# Altium PCB AX309.REV.1.0.PcbDoc (part 1 of 10)
Units mil, origin at the board's own origin, x right, y up, seen from the top; angles counter-clockwise.
Board outline 5185 x 3614 mil, 4 copper layers (Top Layer, GND, Mid-Layer 1, Bottom Layer); 191 components, 352 nets, 1106 pads, 425 vias.
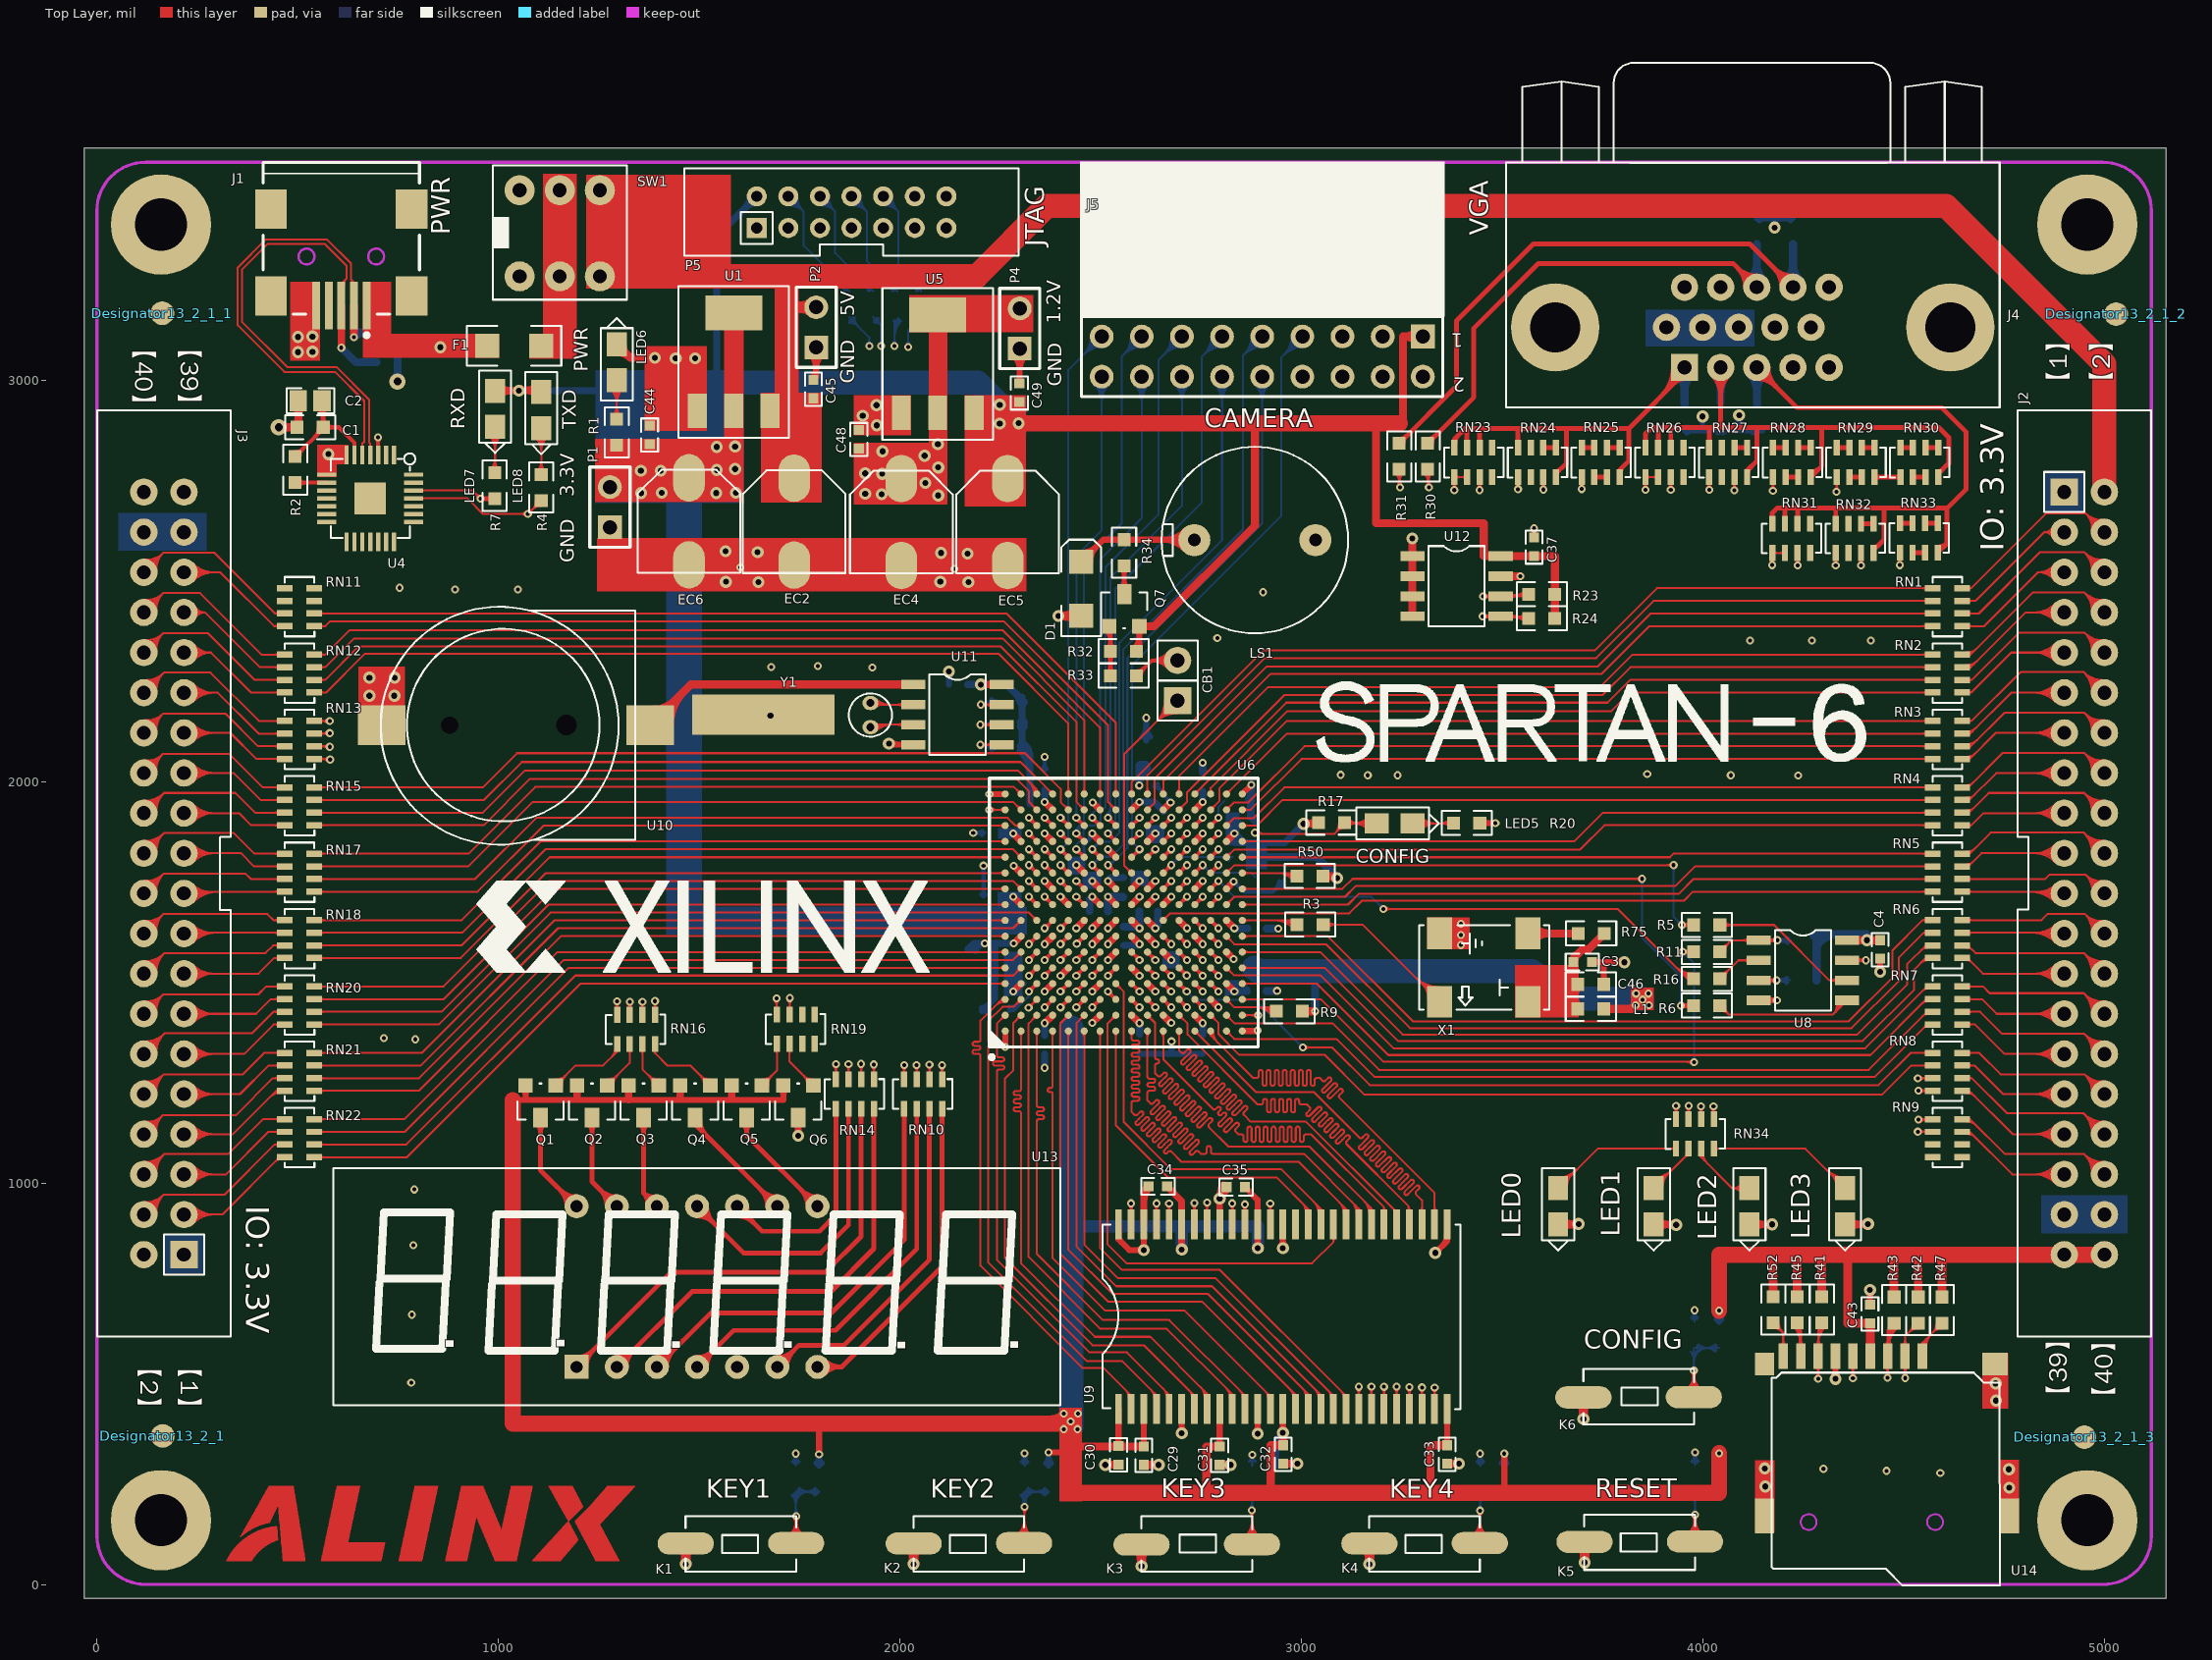
[diagram p0: Top Layer view]
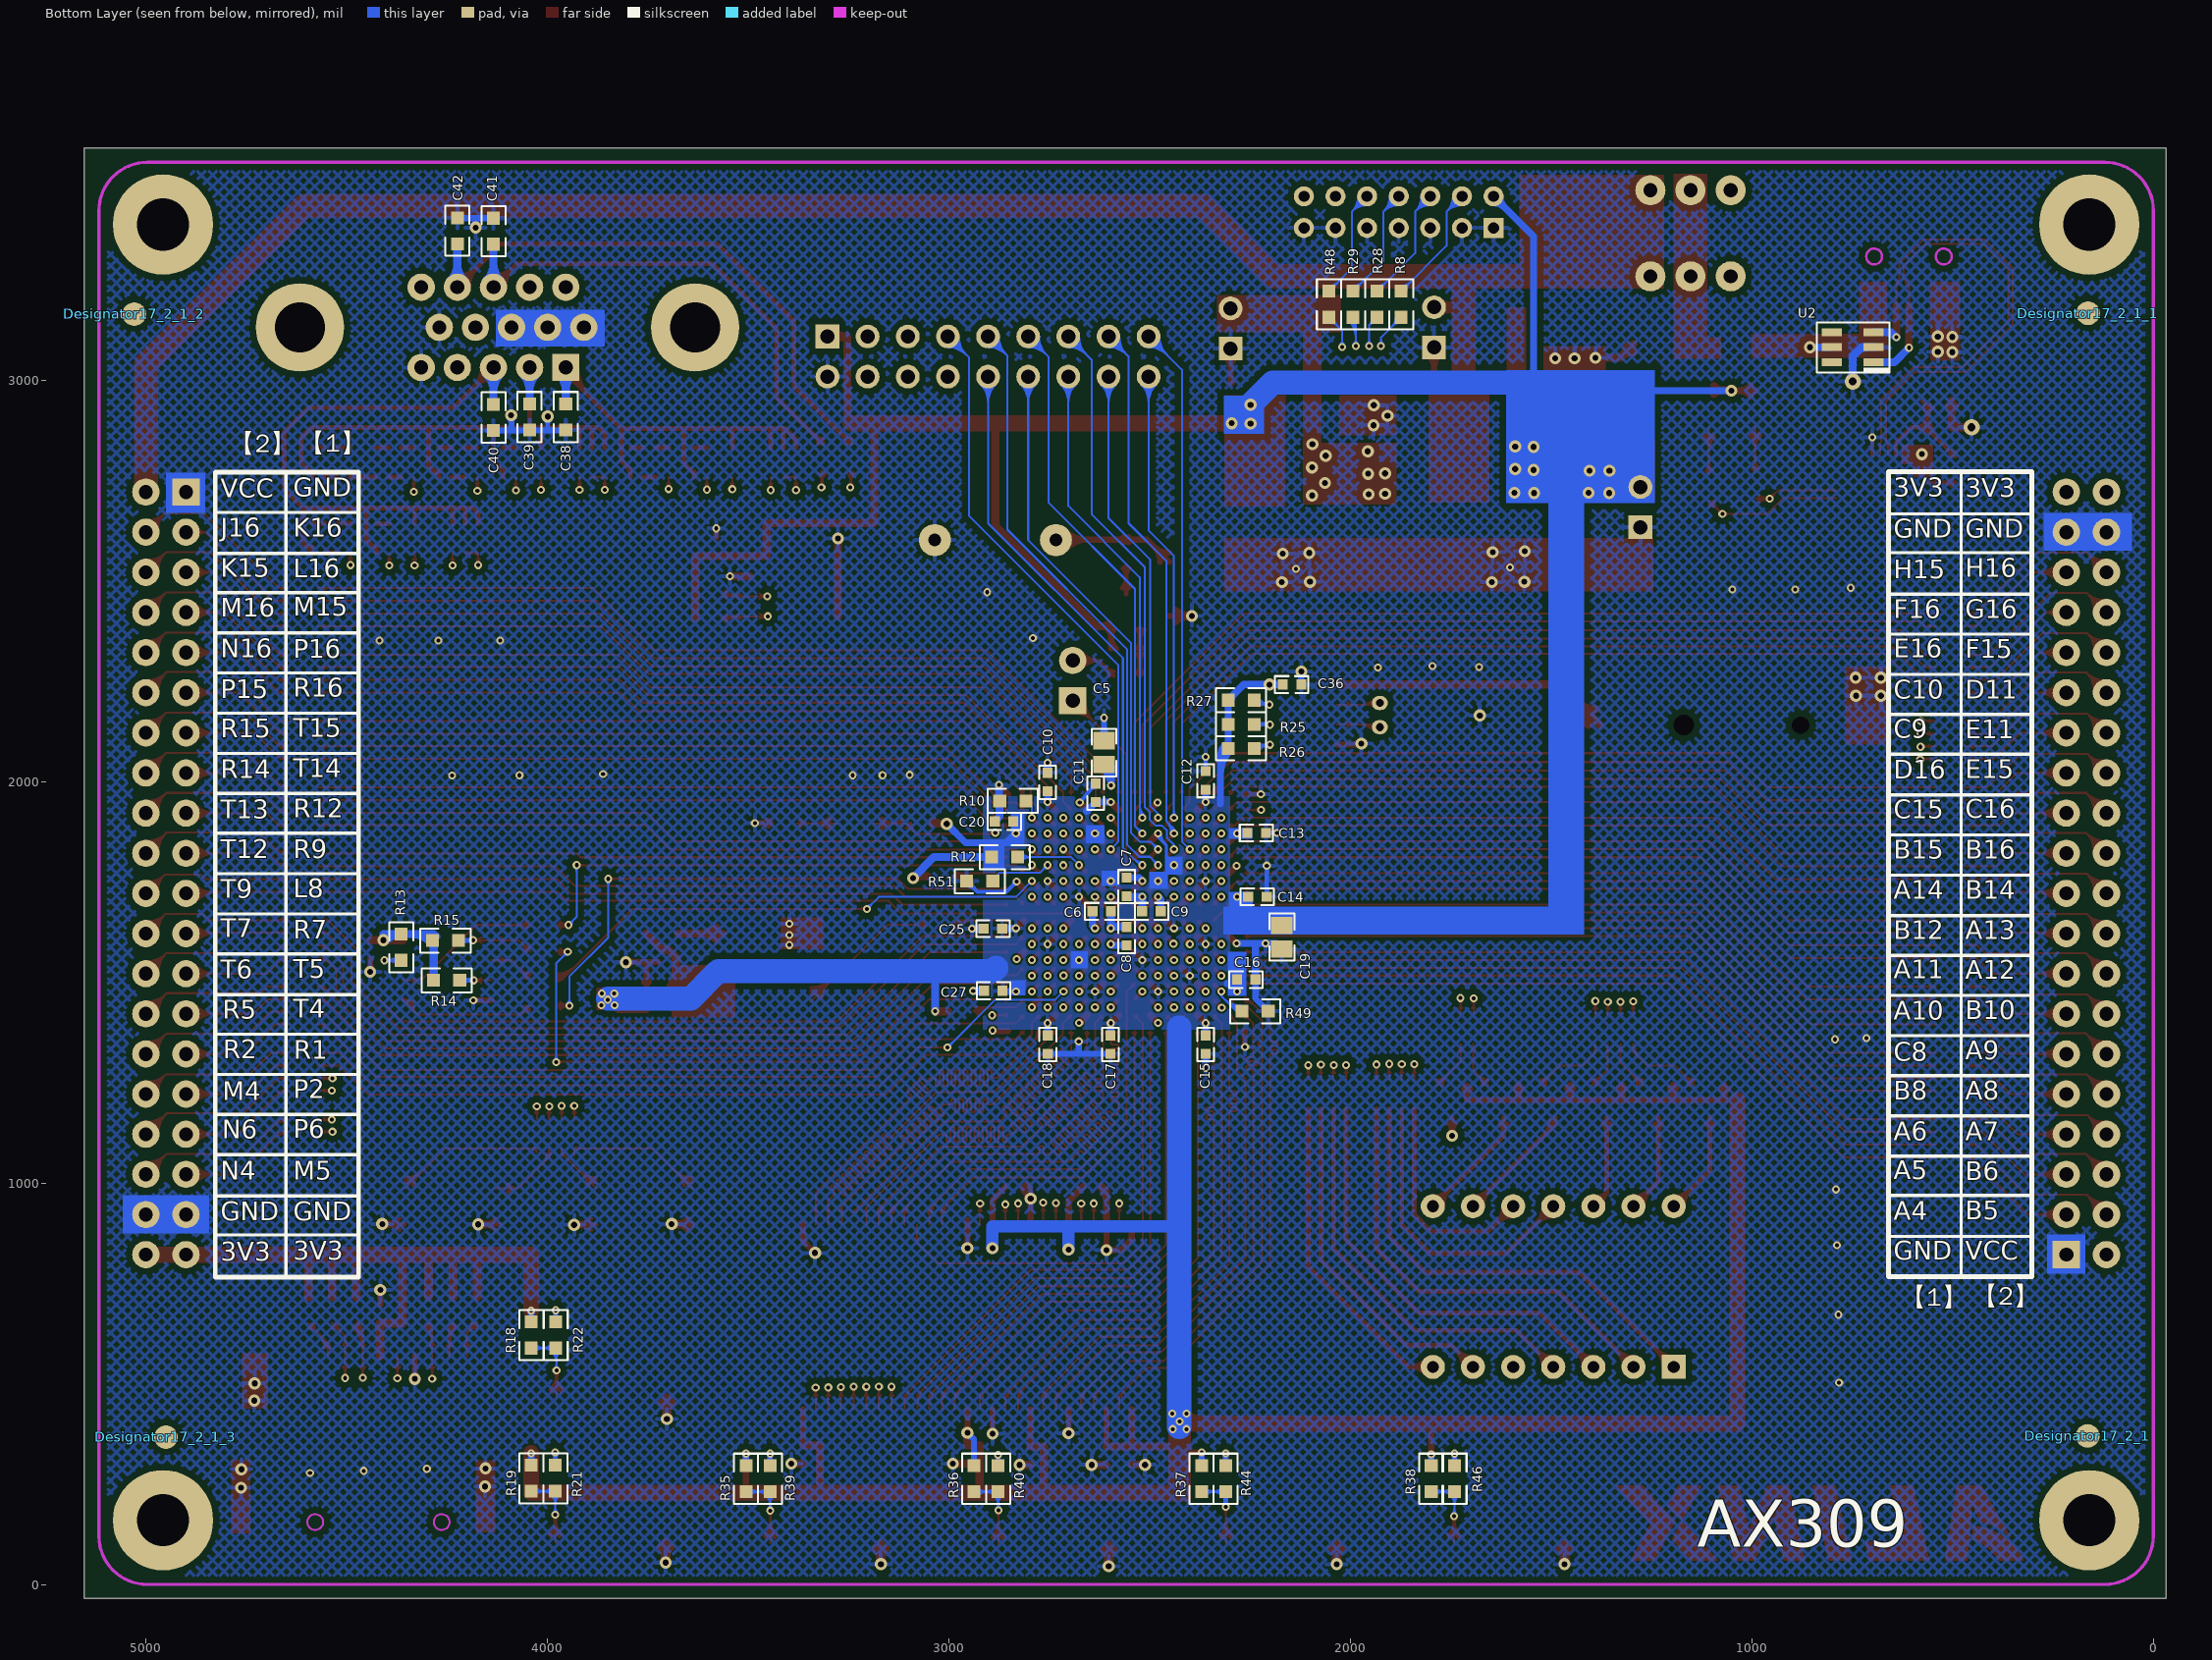
[diagram p1: Bottom Layer view, seen from below]
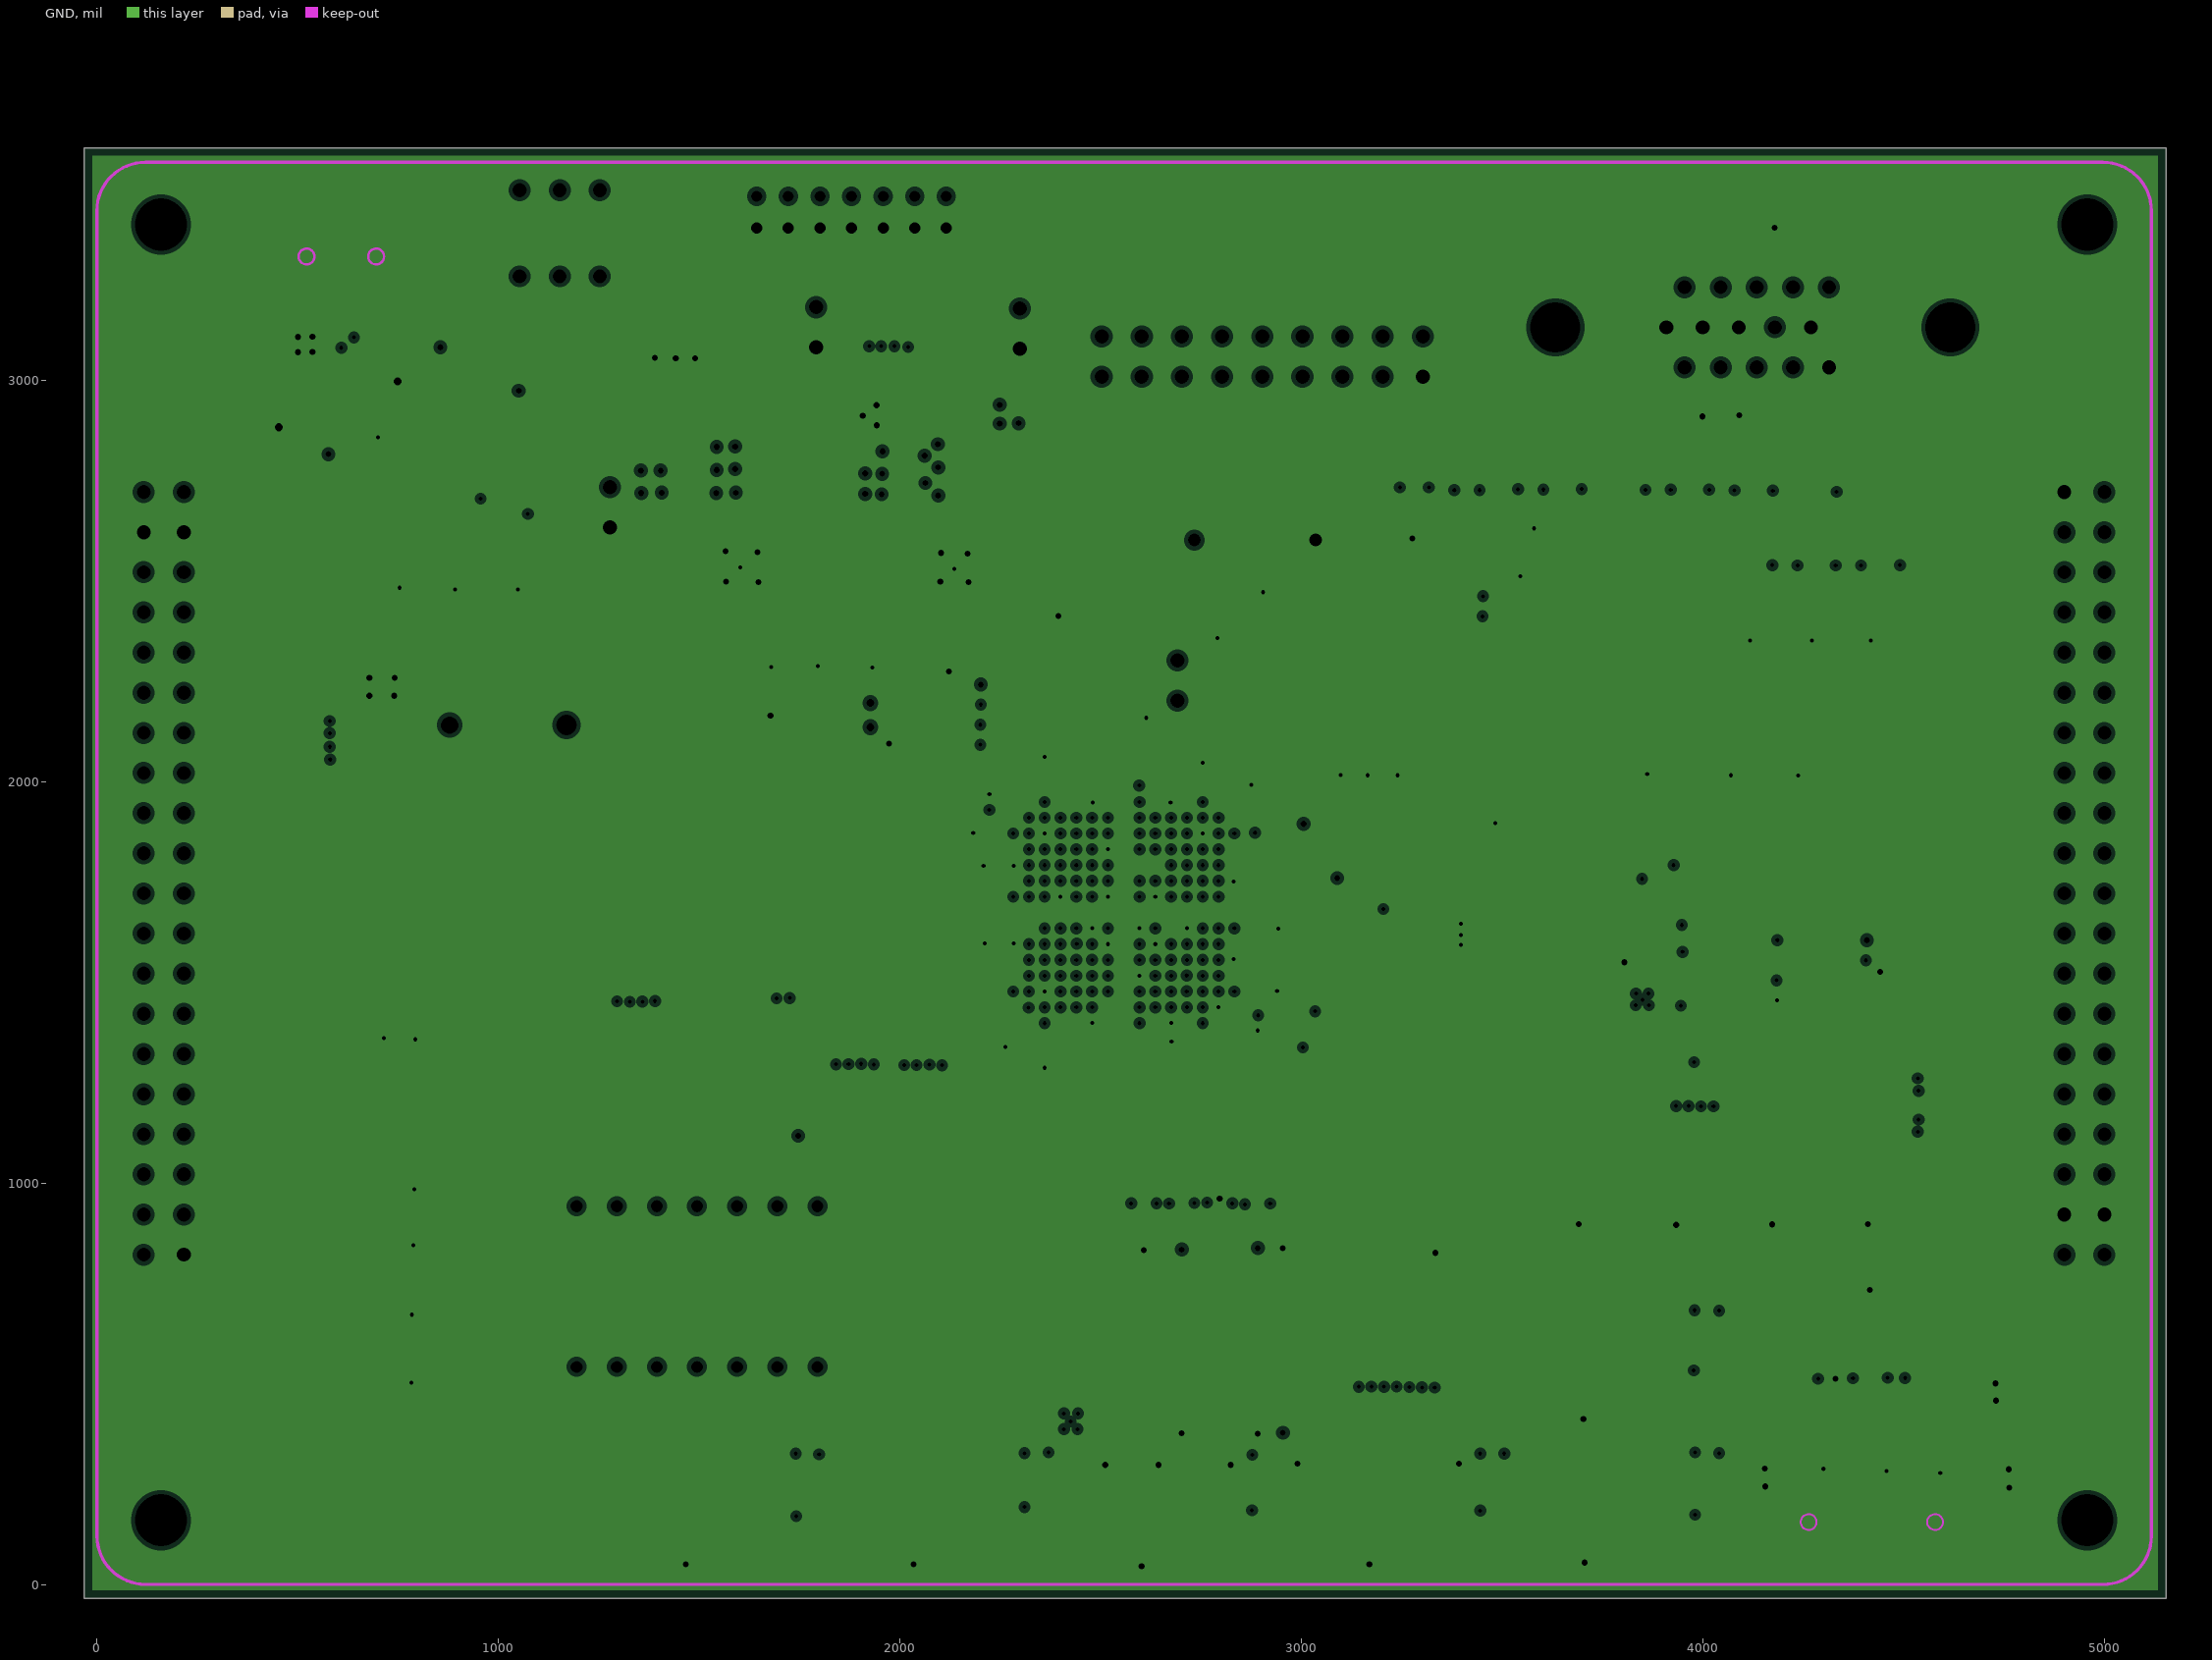
[diagram p2: GND, clearances drawn from the general rule]
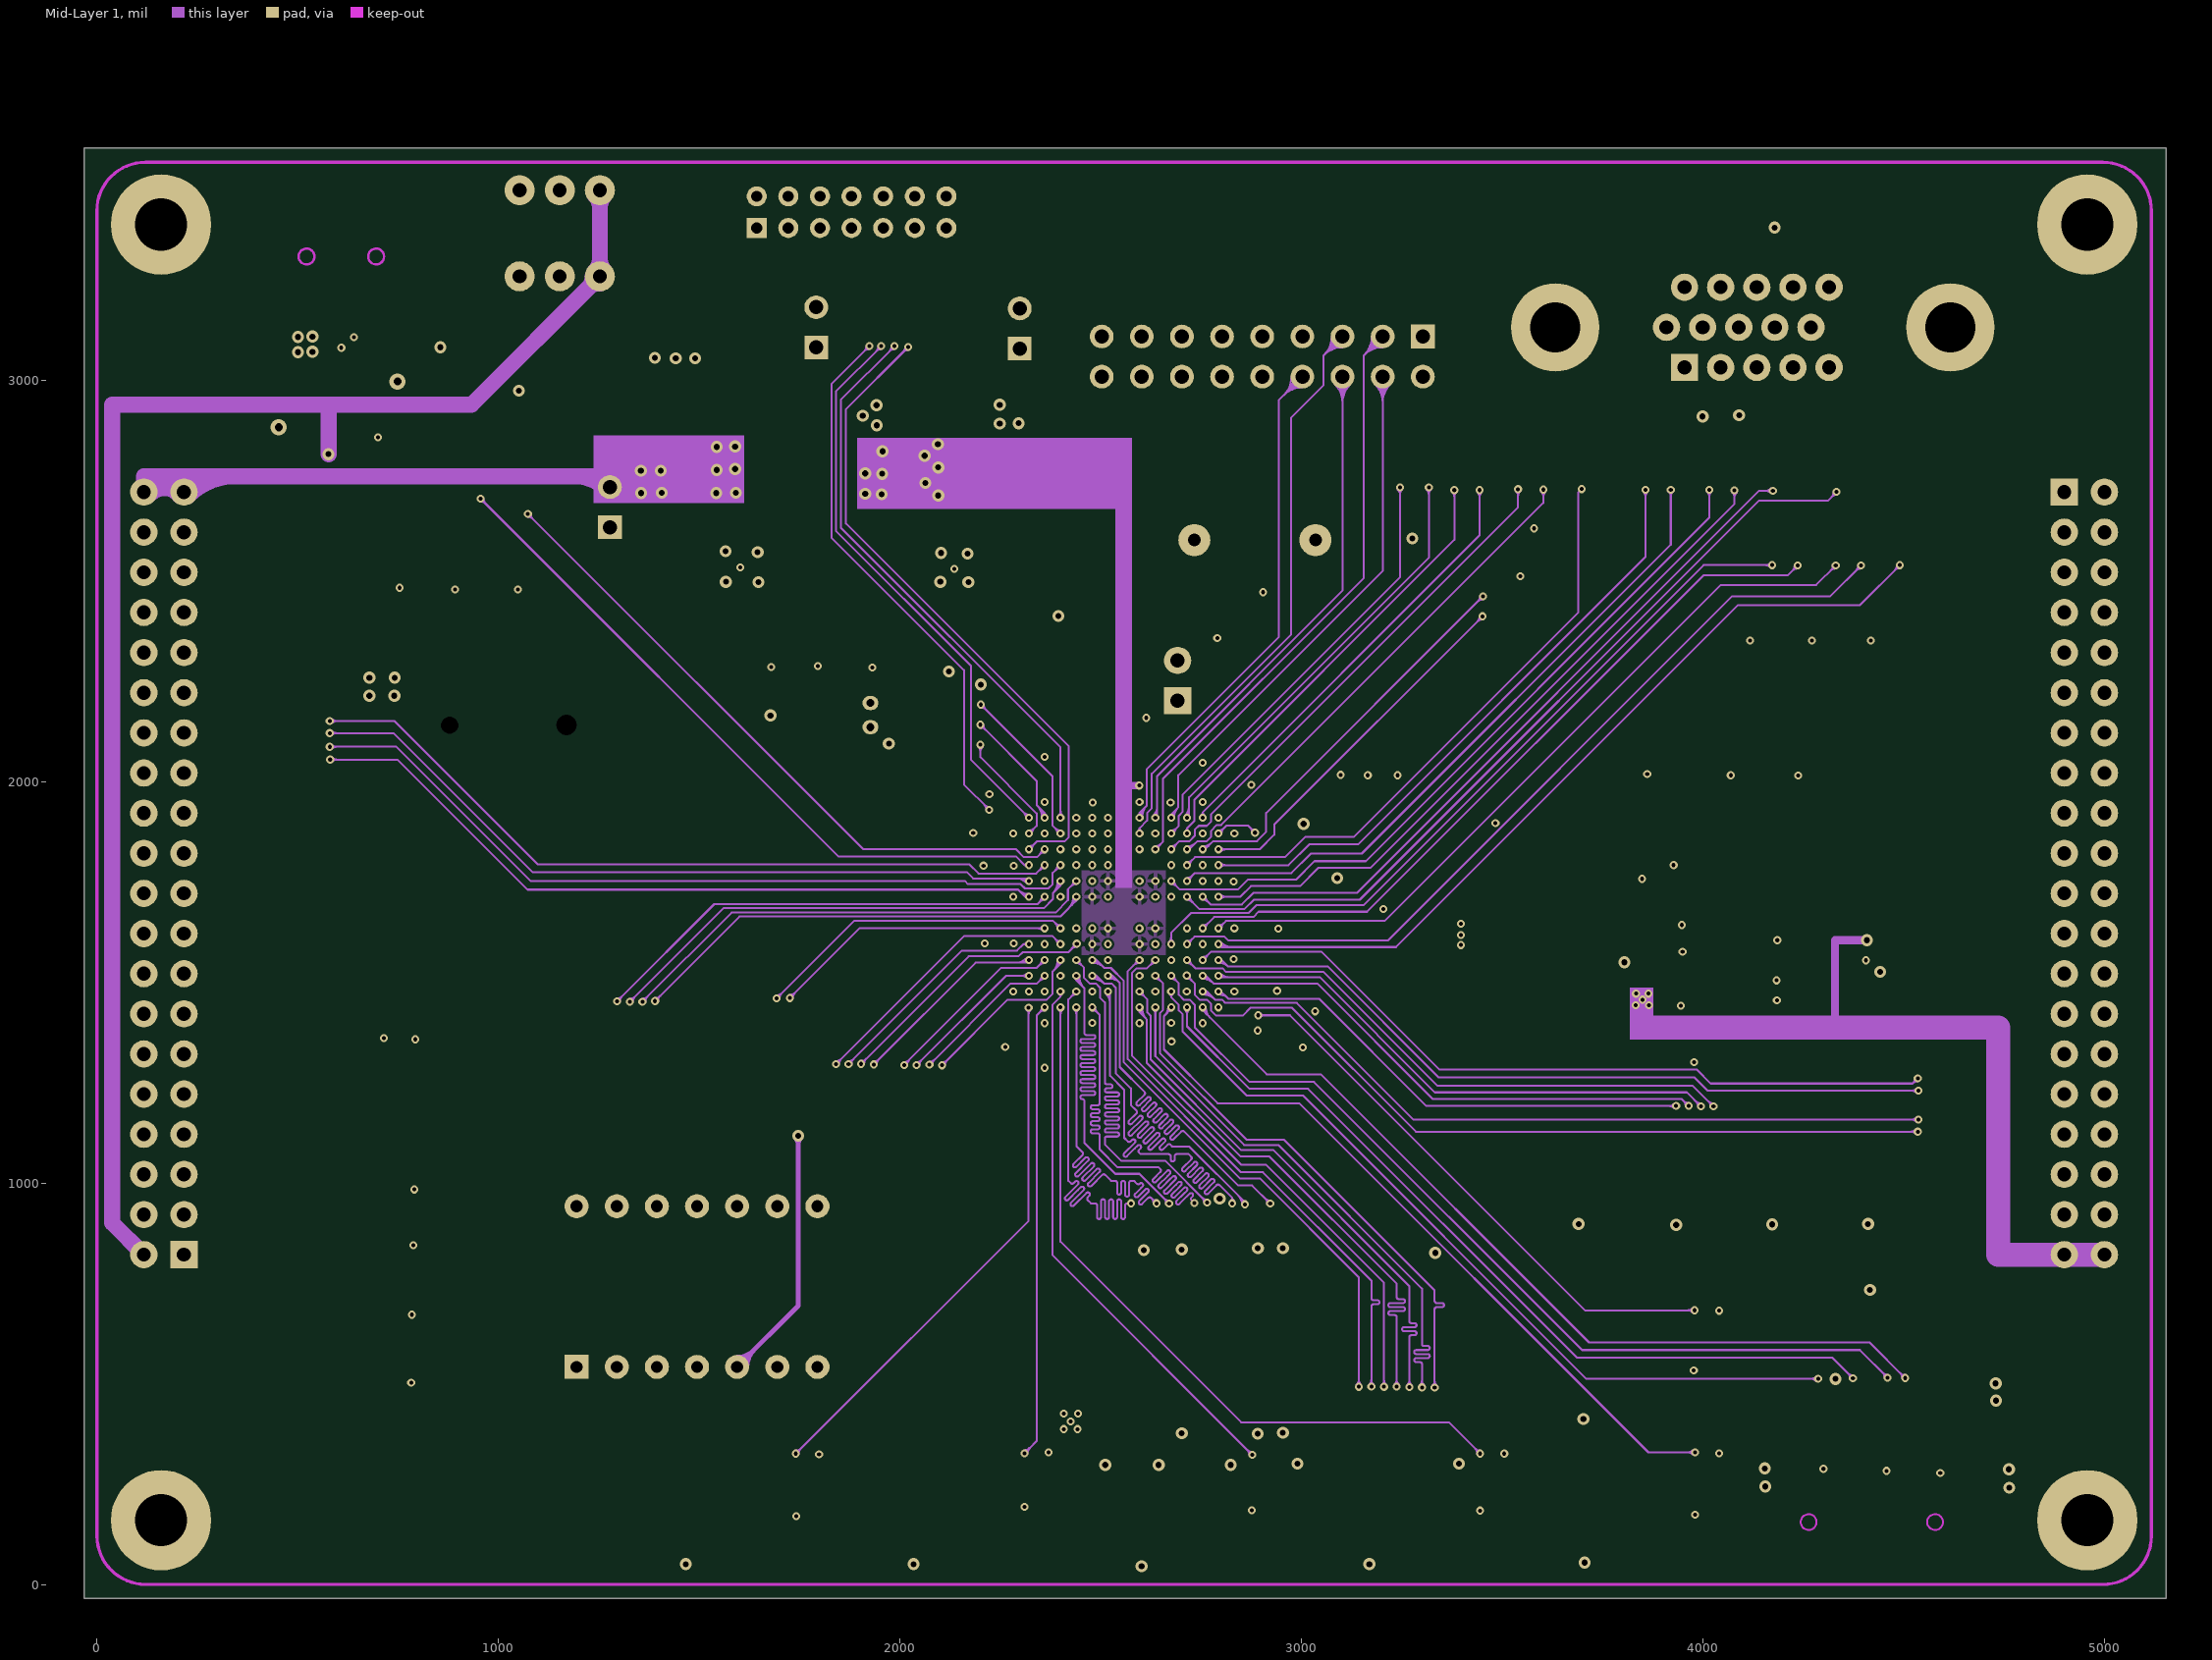
[diagram p3: Mid-Layer 1]

## Layer stack, top to bottom
Top Solder: solder mask 0.4, Solder Resist, Dk 3.5
Top Layer: signal copper 1.4
Dielectric1: core 12.6, FR-4, Dk 4.8
GND: plane copper 1.4, net GND
Dielectric3: prepreg 12.6, FR-4, Dk 4.8
Mid-Layer 1: signal copper 1.4
Dielectric2: core 12.6, FR-4, Dk 4.8
Bottom Layer: signal copper 1.4
Bottom Solder: solder mask 0.4, Solder Resist, Dk 3.5

## Board outline
-31,3579.3 5154,3579.3 5154,3242.3 5154,-34.7 4892,-34.7 -31,-34.7 -31,3579.3

## Design rules (kind name [scope] priority, off if disabled: settings)
Clearance [All] p1: gap=5
ComponentClearance [All] p1 off: gap=10 collisioncheckmode=3 verticalgap=10 showdistances=FALSE
FanoutControl [InNet('GND')] p1: bgadir=Out bgaviamode=Centered fanoutstyle=Auto fanoutdirection=Alternating viagrid=1
FanoutControl Fanout_BGA [IsBGA] p2: bgadir=Out bgaviamode=Centered fanoutstyle=Auto fanoutdirection=Alternating viagrid=1 // Fanout_BGA (Default Rule)
FanoutControl Fanout_LCC [IsLCC] p3: bgadir=Out bgaviamode=Centered fanoutstyle=Auto fanoutdirection=Alternating viagrid=1 // Fanout_LCC (Default Rule)
FanoutControl Fanout_SOIC [IsSOIC] p4: bgadir=Out bgaviamode=Centered fanoutstyle=Auto fanoutdirection=Alternating viagrid=1 // Fanout_SOIC (Default Rule)
FanoutControl Fanout_Small [(CompPinCount < 5)] p5: bgadir=Out bgaviamode=Centered fanoutstyle=Auto fanoutdirection=OutThenIn viagrid=1 // Fanout_Small (Default Rule)
FanoutControl Fanout_Default [All] p6: bgadir=Out bgaviamode=Centered fanoutstyle=Auto fanoutdirection=Alternating viagrid=1 // Fanout_Default (Default Rule)
HoleSize [All] p1: absolutevalues=TRUE maxlimit=200 minlimit=1 maxpercent=80.000 minpercent=20.000
HoleToHoleClearance [All] p1 off: gap=10 allowstackedmicrovias=TRUE
LayerPairs [All] p1 off: enforce=TRUE
MatchedLengths SDRAM_DB [InNetClass('S_DB[0..15]')] p1: tolerance=50 checknetsindiffpair=TRUE checkdiffpairvsdiffpair=TRUE checkothers=TRUE
MatchedLengths SDRAM_A [InNetClass('S_A[0..12]')] p2: tolerance=50 checknetsindiffpair=TRUE checkdiffpairvsdiffpair=TRUE checkothers=TRUE
MinimumSolderMaskSliver [All] p1 off: minsoldermaskwidth=10
NetAntennae [All] p1 off: netantennaetolerance=0
PlaneClearance [All] p1: clearance=10
PlaneConnect [All] p1: planeconnectstyle=Relief reliefexpansion=6 reliefentries=4 reliefconductorwidth=5 reliefairgap=6
PolygonConnect [All] p1: connectstyle=Relief reliefconductorwidth=10 reliefentries=4 polygonreliefangle="90 Angle" airgapwidth=10
RoutingVias [All] p1: holewidth=10 width=20 viastyle="Through Hole" minholewidth=10 minwidth=20 maxholewidth=50 maxwidth=100
SilkToSilkClearance [All] p1 off: silktosilkclearance=10
SilkToSolderMaskClearance SilkscreenOverComponentPads [IsPad] p1 off: minsilkscreentomaskgap=10 clearancetoexposedcopper=TRUE
SolderMaskExpansion [All] p1: expansion=4
Width D2V5 [InNet('D2V5')] p1: maxlimit=60 minlimit=15 preferedwidth=20
Width D1V2 [InNet('D1V2')] p2: maxlimit=60 minlimit=15 preferedwidth=20
Width D3V3 [InNet('D3V3')] p3: maxlimit=60 minlimit=6 preferedwidth=20
Width GND [InNet('GND')] p4 off: maxlimit=60 minlimit=10 preferedwidth=20
Width [All] p5 off: maxlimit=60 minlimit=5 preferedwidth=6
14 further rules are at their usual default settings.

## Classes and differential pairs
net class S_DB[0..15]: S_DB0 S_DB1 S_DB2 S_DB3 S_DB4 S_DB5 S_DB6 S_DB7 S_DB8 S_DB9 S_DB10 S_DB11 S_DB12 S_DB13 S_DB14 S_DB15
net class S_A[0..12]: S_A0 S_A1 S_A2 S_A3 S_A4 S_A5 S_A6 S_A7 S_A8 S_A9 S_A10 S_A11 S_A12
component class 1_POWER: C1 C2 C44 C45 C48 C49 EC2 EC4 EC5 EC6 F1 J1 LED6 LED7 LED8 P1 P2 P4 R1 R2 R4 R7 SW1 U1 U2 U4 U5
component class 5_SDRAM: C29 C30 C31 C32 C33 C34 C35 U9
component class 4_FPGA: C3 C4 C5 C6 C7 C8 C9 C10 C11 C12 C13 C14 C15 C16 C17 C18 C19 C20 C25 C27 C46 K5 K6 L1 LED5 P5 R3 R8 R10 R12 R13 R14 R15 R16 R17 R18 R19 R20 R21 R22 R28 R29 R48 R75 U8 X1
component class 3_FPGA: R5 R6 R9 R11 R50 R51
component class 6_DIG: C36 C37 J2 J3 LED0 LED1 LED2 LED3 Q1 Q2 Q3 Q4 Q5 Q6 R23 R24 R25 R26 R27 RN1 RN2 RN3 RN4 RN5 RN6 RN7 RN8 RN9 RN10 RN11 RN12 RN13 RN14 RN15 RN16 RN17 RN18 RN19 RN20 RN21 RN22 RN34 U10 U11 U12 U13 Y1
component class 7_VGA: C38 C39 C40 C41 C42 C43 CB1 D1 J4 J5 K1 K2 K3 K4 LS1 Q7 R30 R31 R32 R33 R34 R35 R36 R37 R38 R39 R40 R41 R42 R43 R44 R45 R46 R47 R52 RN23 RN24 RN25 RN26 RN27 RN28 RN29 RN30 RN31 RN32 RN33 U14
net class DIG[0..7]: DIG0 DIG1 DIG2 DIG3 DIG4 DIG5 DIG6 DIG7
net class SEL[0..5]: SEL0 SEL1 SEL2 SEL3 SEL4 SEL5
net class VGAD[15..0]: VGAD0 VGAD1 VGAD2 VGAD3 VGAD4 VGAD5 VGAD6 VGAD7 VGAD8 VGAD9 VGAD10 VGAD11 VGAD12 VGAD13 VGAD14 VGAD15
component class 2_FPGA: R49 U6

## Components (designator, comment, footprint, x,y, rotation, side; value= is the part's Value field where it differs from the comment)
C1 "1uF" 0603 564,2883 r180 top
C2 "10uF" 0805 561,2949 r180 top
C3 "0.1uF" 0402 3678,1551 r0 top
C4 "104" 0402 4442,1559 r90 top
C5 "10uF" 0805 2614,2043 r90 bottom
C6 "104" 0402 2473,1677 r0 bottom
C7 "104" 0402 2558,1592 r90 bottom
C8 "104" 0402 2558,1761 r270 bottom
C9 "104" 0402 2643,1677 r180 bottom
C10 "104" 0402 2755,1976 r90 bottom
C11 "104" 0402 2635,1949 r90 bottom
C12 "104" 0402 2361,1980 r90 bottom
C13 "104" 0402 2257,1872 r180 bottom
C14 "104" 0402 2255,1713 r180 bottom
C15 "104" 0402 2361.15,1368 r270 bottom
C16 "104" 0402 2283,1507 r180 bottom
C17 "104" 0402 2598,1368 r270 bottom
C18 "104" 0402 2754,1368 r270 bottom
C19 "10uF" 0805 2171,1642 r270 bottom
C20 "104" 0402 2840,1901 r0 bottom
C25 "104" 0402 2868,1634 r0 bottom
C27 "104" 0402 2867,1479 r0 bottom
C29 "104" 0402 2607.99,344.01 r270 top
C30 "104" 0402 2545,345 r270 top
C31 "104" 0402 2797,344 r270 top
C32 "104" 0402 2955,347 r270 top
C33 "104" 0402 3364,347 r270 top
C34 "104" 0402 2666,992 r180 top
C35 "104" 0402 2860,990 r180 top
C36 "104" 0402 2169,2242 r180 bottom
C37 "104" 0402 3580,2562 r90 top
C38 "5p1" 0603 3955,2941 r270 bottom
C39 "5p1" 0603 4045,2941 r270 bottom
C40 "5p1" 0603 4135,2940 r270 bottom
C41 "5p1" 0603 4135,3339 r90 bottom
C42 "5p1" 0603 4225,3340 r90 bottom
C43 "104" 0402 4417,651 r90 top
C44 "104" 0402 1377,2841 r90 top
C45 "104" 0402 1785,2955 r90 top
C46 "4.7uF" 0603 3689,1495 r0 top
C48 "104" 0402 1898,2830 r90 top
C49 "104" 0402 2298,2946 r90 top
CB1 "BUZ" SIP2 2692,2202 r90 top
D1 "4148" 1206A 2452,2413 r90 top
Designator13_2_1 "Comment" TPS 164,370 r0 top
Designator13_2_1_1 "Comment" TPS 163,3167 r0 top
Designator13_2_1_2 "Comment" TPS 5030,3165 r0 top
Designator13_2_1_3 "Comment" TPS 4951,367 r0 top
Designator17_2_1 "Comment" TPS 164,370 r180 bottom
Designator17_2_1_1 "Comment" TPS 163,3167 r180 bottom
Designator17_2_1_2 "Comment" TPS 5030,3165 r180 bottom
Designator17_2_1_3 "Comment" TPS 4951,367 r180 bottom
EC2 "100uF/16V" AEC6.5 1737,2756 r270 top
EC4 "100uF/16V" AEC6.5 2004,2755 r270 top
EC5 "100uF/16V" AEC6.5 2269,2755 r270 top
EC6 "100uF/16V" AEC6.5 1475,2757 r270 top
F1 "Fuse" 1206 972,3086 r0 top
J1 "EC2" MINIUSBB 609,3186.3 r270 top
J2 "IDC40" IDC-40J 4951,1771.65 r270 top
J3 "IDC40" IDC-40J 167,1771.65 r90 top
J4 "VGA" VGA 3955,3032 r90 top
J5 "Header 9X2" HDR2X9 3303,3109.17 r180 top locked
K1 "KEY1" KEY735SO 1742,103 r180 top
K2 "KEY2" KEY735SO 2309.67,103 r180 top
K3 "KEY3" KEY735SO 2602.33,99.2 r0 top
K4 "KEY4" KEY735SO 3445,103 r180 top
K5 "RESET" KEY735SO 3981,107 r180 top
K6 "CONFIG" KEY735SO 3703,466 r0 top
L1 "Bead" 0603 3754,1434 r180 top
LED0 "LED0" LEDSO 3640,897 r90 top
LED1 "LED1" LEDso 3878.33,897 r90 top
LED2 "LED2" LEDSO 4116.67,897 r90 top
LED3 "LED3" LEDSO 4355,897 r90 top
LED5 "CONFIG" LEDSO 3278,1896 r180 top
LED6 "D3V3" LEDSO 1295,3090 r270 top
LED7 "RXD" LEDSO 992,2884 r90 top
LED8 "TXD" LEDSO 1107,2881 r90 top
LS1 "BUZZER" BUZZER 2734,2602 r0 top
P1 "3.3V" HDR1X2 1278,2634 r90 top
P2 "5V" HDR1X2 1792,3082 r90 top
P4 "1.2V" HDR1X2 2299,3079 r90 top
P5 "JTAG" JTAG14-.5 1880,3419 r0 top
Q1 "9012" SOT23 1143,1243 r180 top
Q2 "9012" SOT23 1271.4,1243 r180 top
Q3 "9012" SOT23 1399.8,1243 r180 top
Q4 "9012" SOT23 1528.2,1243 r180 top
Q5 "9012" SOT23 1656.6,1243 r180 top
Q6 "9012" SOT23 1785,1243 r180 top
Q7 "9012" SOT23 2522,2387 r0 top
R1 "1K" 0603 1295,2838 r90 top
R2 "10k" 0603 494,2745 r90 top
R3 "33R" 0603 2990,1644 r0 top
R4 "1K" 0603 1107,2700.3 r90 top
R5 "33R" 0603 3978,1643 r0 top
R6 "33R" 0603 3978,1442 r0 top
R7 "1K" 0603 991,2705 r90 top
R8 "33" 0603 1874,3222 r270 bottom
R9 "10K" 0603 2938,1428 r0 top
R10 "10K" 0603 2874,1952 r180 bottom
R11 "33R" 0603 3978,1576 r0 top
R12 "10K" 0603 2894,1812 r180 bottom
R13 "10K" 0603 4365,1555 r90 bottom
R14 "10K" 0603 4219,1505 r0 bottom
R15 "10K" 0603 4222,1604 r0 bottom
R16 "33R" 0603 3978,1509 r0 top
R17 "330" 0603 3108,1898 r180 top
R18 "10k" 0603 4041,654 r270 bottom
R19 "10k" 0603 4041,297 r270 bottom
R20 "220" 0603 3445,1897 r180 top
R21 "100" 0603 3981,297 r270 bottom
R22 "100" 0603 3980,654 r270 bottom
R23 "4k7" 0603 3632,2467 r180 top
R24 "4k7" 0603 3632,2407 r180 top
R25 "10k" 0603 2305,2143 r180 bottom
R26 "10k" 0603 2305,2083 r180 bottom
R27 "10k" 0603 2305,2203 r180 bottom
R28 "33" 0603 1934,3222 r270 bottom
R29 "33" 0603 1994,3222 r270 bottom
R30 "22" 0603 3315,2843 r270 top
R31 "22" 0603 3244,2843 r270 top
R32 "1K" 0603 2590,2325 r180 top
R33 "2K2" 0603 2590,2264 r180 top
R34 "15" 0603 2559,2538 r90 top
R35 "10k" 0603 3506,296 r270 bottom
R36 "10k" 0603 2938,296 r270 bottom
R37 "10k" 0603 2371,296 r270 bottom
R38 "10k" 0603 1799,296 r270 bottom
R39 "100" 0603 3446,296 r270 bottom
R40 "100" 0603 2878,296 r270 bottom
R41 "1K" 0603 4297,717 r270 top
R42 "1K" 0603 4537,716 r270 top
R43 "1K" 0603 4477,716 r270 top
R44 "100" 0603 2311,296 r270 bottom
R45 "1K" 0603 4236,717 r270 top
R46 "100" 0603 1741,296 r270 bottom
R47 "1K" 0603 4596,716 r270 top
R48 "33" 0603 2054,3222 r270 bottom
R49 "4K7" 0603 2270,1428 r180 bottom
R50 "1K" 0603 2989,1765 r0 top
R51 "1K" 0603 2891,1752 r0 bottom
R52 "1K" 0603 4176,717 r270 top
R75 "10k" 0603 3690,1622 r0 top
RN1 "33R" RN-8P 4573,2482 r0 top
RN2 "33R" RN-8P 4573,2316.62 r0 top
RN3 "33R" RN-8P 4573,2151.25 r0 top
RN4 "33R" RN-8P 4573,1985.88 r0 top
RN5 "33R" RN-8P 4573,1820.5 r0 top
RN6 "33R" RN-8P 4573,1655.12 r0 top
RN7 "33R" RN-8P 4573,1489.75 r0 top
RN8 "33R" RN-8P 4573,1324.38 r0 top
RN9 "33R" RN-8P 4573,1159 r0 top
RN10 "470" RN-8P 2011,1185 r90 top
RN11 "33R" RN-8P 468,2482 r0 top
RN12 "33R" RN-8P 468,2316.62 r0 top
RN13 "33R" RN-8P 468,2151.25 r0 top
RN14 "470" RN-8P 1841,1185 r90 top
RN15 "33R" RN-8P 468,1985.88 r0 top
RN16 "470" RN-8P 1296,1346 r90 top
RN17 "33R" RN-8P 468,1820.5 r0 top
RN18 "33R" RN-8P 468,1655.12 r0 top
RN19 "470" RN-8P 1694,1347 r90 top
RN20 "33R" RN-8P 468,1489.75 r0 top
RN21 "33R" RN-8P 468,1324.38 r0 top
RN22 "33R" RN-8P 468,1159 r0 top
RN23 "1K" RN-8P 3476,2832 r270 top
RN24 "2K" RN-8P 3634.71,2832 r270 top
RN25 "2K" RN-8P 3793.43,2832 r270 top
RN26 "1K" RN-8P 3952.14,2832 r270 top
RN27 "2K" RN-8P 4110.86,2832 r270 top
RN28 "2K" RN-8P 4269.57,2832 r270 top
RN29 "2K" RN-8P 4428.29,2832 r270 top
RN30 "2K" RN-8P 4587,2832 r270 top
RN31 "1K" RN-8P 4268,2643 r270 top
RN32 "2K" RN-8P 4426,2643 r270 top
RN33 "2K" RN-8P 4586,2644 r270 top
RN34 "470" RN-8P 4028,1159 r270 top
SW1 "SW" KEY_DPDT 1053,3259 r90 top
U1 "1117-3.3" SOT223 1496,2924 r0 top
U2 "SRV05-4" SOT23-6 697,3045 r90 bottom
U4 "CP2102" QFN28 740,2814 r270 top
U5 "1117-1.2" SOT223 2004,2919 r0 top
U6 "XC6SLX9-2FTG256C" FTG256 2558,1674 r90 top locked
U8 "M25P16-VMN3PB" SO8 4140,1605 r0 top
U9 "HY57V2562GTR" TSOP-54 2545,437 r180 top
U10 "battery" BATSO 1418,2141 r0 top
U11 "DS1302" SO8 2034,2242 r0 top
U12 "24LC04" SO8 3277,2562 r0 top
U13 "HEX6" NIX_6 1195,542 r0 top
U14 "SD" TF 4459,370 r90 top locked
X1 "50M" CY_4 3565,1452 r0 top
Y1 "32.768kHz" CY_SMALL 1927,2196 r270 top

## Footprints (in the part's own frame and the unit in brackets; to place one, negate y for a bottom-side part, rotate by r counter-clockwise, add the part's x,y. Pads: shape width x height; smd on the part's side, far side on the other; paste and mask are expansions set on the pad)
0402 [mil]
  rect 25x25 smd: 1(0,0) 2(46.24,0)
  silkscreen extent -19,-21 64,21
0603 [mil]
  rect 32x32 smd: 1(0,0) 2(65,0)
  silkscreen extent -30,-30 95,30
0805 [mm]
  rect 1.1x1.36 smd: 1(0,0) 2(1.5,0)
  silkscreen extent -0.76,-0.79 2.24,0.79
1206 [mil]
  rect 60x60 smd: 1(0,0) 2(135,0)
  silkscreen extent -50,-50 185,50
1206A [mil]
  rect 60x60 smd: 1(0,0) 2(135,0)
  silkscreen extent -50,-50 190,50
AEC6.5 [mm]
  oval 3x2 smd: 1(0,0) 2(5.5,0)
  silkscreen extent -0.5,-3.25 6,3.25
BATSO [mm]
  round 1 hole 1.1: 0(-13.7,0)
  round 1 hole 1.3: 0(-6.3,0)
  rect 3x2.5 smd: 1(-1,0) 2(-18,0)
  silkscreen extent -18.06,-7.57 -1.95,7.48
BUZZER [mil]
  round 80 hole 32: 1(0,0) 2(301.57,0)
  silkscreen extent -81,-232 383,232
CY_4 [mm]
  rect 1.6x2 smd: 1(0,4.318) 2(-5.588,4.318) 3(-5.588,0) 4(0,0)
  silkscreen extent -6.88,-0.51 1.35,4.83
CY_SMALL [mil]
  rect 100x354.33 smd: 0(29,-267)
  oval 35x40 hole 20: 1(0,0) 2(60,0)
  silkscreen extent -24,-54 84,54
FTG256 [mm] "BGA, 256-Leads, Body 17x17mm, Pitch 1mm"
  round 0.45 smd: A1(-7.5,7.5) A2(-6.5,7.5) A3(-5.5,7.5) A4(-4.5,7.5) A5(-3.5,7.5) A6(-2.5,7.5) A7(-1.5,7.5) A8(-0.5,7.5) A9(0.5,7.5) A10(1.5,7.5) A11(2.5,7.5) A12(3.5,7.5) A13(4.5,7.5) A14(5.5,7.5) A15(6.5,7.5) A16(7.5,7.5) B1(-7.5,6.5) B2(-6.5,6.5) B3(-5.5,6.5) B4(-4.5,6.5) B5(-3.5,6.5) B6(-2.5,6.5) B7(-1.5,6.5) B8(-0.5,6.5) B9(0.5,6.5) B10(1.5,6.5) B11(2.5,6.5) B12(3.5,6.5) B13(4.5,6.5) B14(5.5,6.5) B15(6.5,6.5) B16(7.5,6.5) C1(-7.5,5.5) C2(-6.5,5.5) C3(-5.5,5.5) C4(-4.5,5.5) C5(-3.5,5.5) C6(-2.5,5.5) C7(-1.5,5.5) C8(-0.5,5.5) C9(0.5,5.5) C10(1.5,5.5) C11(2.5,5.5) C12(3.5,5.5) C13(4.5,5.5) C14(5.5,5.5) C15(6.5,5.5) C16(7.5,5.5) D1(-7.5,4.5) D2(-6.5,4.5) D3(-5.5,4.5) D4(-4.5,4.5) D5(-3.5,4.5) D6(-2.5,4.5) D7(-1.5,4.5) D8(-0.5,4.5) D9(0.5,4.5) D10(1.5,4.5) D11(2.5,4.5) D12(3.5,4.5) D13(4.5,4.5) D14(5.5,4.5) D15(6.5,4.5) D16(7.5,4.5) E1(-7.5,3.5) E2(-6.5,3.5) E3(-5.5,3.5) E4(-4.5,3.5) E5(-3.5,3.5) E6(-2.5,3.5) E7(-1.5,3.5) E8(-0.5,3.5) E9(0.5,3.5) E10(1.5,3.5) E11(2.5,3.5) E12(3.5,3.5) E13(4.5,3.5) E14(5.5,3.5) E15(6.5,3.5) E16(7.5,3.5) F1(-7.5,2.5) F2(-6.5,2.5) F3(-5.5,2.5) F4(-4.5,2.5) F5(-3.5,2.5) F6(-2.5,2.5) F7(-1.5,2.5) F8(-0.5,2.5) F9(0.5,2.5) F10(1.5,2.5) F11(2.5,2.5) F12(3.5,2.5) F13(4.5,2.5) F14(5.5,2.5) F15(6.5,2.5) F16(7.5,2.5) G1(-7.5,1.5) G2(-6.5,1.5) G3(-5.5,1.5) G4(-4.5,1.5) G5(-3.5,1.5) G6(-2.5,1.5) G7(-1.5,1.5) G8(-0.5,1.5) G9(0.5,1.5) G10(1.5,1.5) G11(2.5,1.5) G12(3.5,1.5) G13(4.5,1.5) G14(5.5,1.5) G15(6.5,1.5) G16(7.5,1.5) H1(-7.5,0.5) H2(-6.5,0.5) H3(-5.5,0.5) H4(-4.5,0.5) H5(-3.5,0.5) H6(-2.5,0.5) H7(-1.5,0.5) H8(-0.5,0.5) H9(0.5,0.5) H10(1.5,0.5) H11(2.5,0.5) H12(3.5,0.5) H13(4.5,0.5) H14(5.5,0.5) H15(6.5,0.5) H16(7.5,0.5) J1(-7.5,-0.5) J2(-6.5,-0.5) J3(-5.5,-0.5) J4(-4.5,-0.5) J5(-3.5,-0.5) J6(-2.5,-0.5) J7(-1.5,-0.5) J8(-0.5,-0.5) J9(0.5,-0.5) J10(1.5,-0.5) J11(2.5,-0.5) J12(3.5,-0.5) J13(4.5,-0.5) J14(5.5,-0.5) J15(6.5,-0.5) J16(7.5,-0.5) K1(-7.5,-1.5) K2(-6.5,-1.5) K3(-5.5,-1.5) K4(-4.5,-1.5) K5(-3.5,-1.5) K6(-2.5,-1.5) K7(-1.5,-1.5) K8(-0.5,-1.5) K9(0.5,-1.5) K10(1.5,-1.5) K11(2.5,-1.5) K12(3.5,-1.5) K13(4.5,-1.5) K14(5.5,-1.5) K15(6.5,-1.5) K16(7.5,-1.5) L1(-7.5,-2.5) L2(-6.5,-2.5) L3(-5.5,-2.5) L4(-4.5,-2.5) L5(-3.5,-2.5) L6(-2.5,-2.5) L7(-1.5,-2.5) L8(-0.5,-2.5) L9(0.5,-2.5) L10(1.5,-2.5) L11(2.5,-2.5) L12(3.5,-2.5) L13(4.5,-2.5) L14(5.5,-2.5) L15(6.5,-2.5) L16(7.5,-2.5) M1(-7.5,-3.5) M2(-6.5,-3.5) M3(-5.5,-3.5) M4(-4.5,-3.5) M5(-3.5,-3.5) M6(-2.5,-3.5) M7(-1.5,-3.5) M8(-0.5,-3.5) M9(0.5,-3.5) M10(1.5,-3.5) M11(2.5,-3.5) M12(3.5,-3.5) M13(4.5,-3.5) M14(5.5,-3.5) M15(6.5,-3.5) M16(7.5,-3.5) N1(-7.5,-4.5) N2(-6.5,-4.5) N3(-5.5,-4.5) N4(-4.5,-4.5) N5(-3.5,-4.5) N6(-2.5,-4.5) N7(-1.5,-4.5) N8(-0.5,-4.5) N9(0.5,-4.5) N10(1.5,-4.5) N11(2.5,-4.5) N12(3.5,-4.5) N13(4.5,-4.5) N14(5.5,-4.5) N15(6.5,-4.5) N16(7.5,-4.5) P1(-7.5,-5.5) P2(-6.5,-5.5) P3(-5.5,-5.5) P4(-4.5,-5.5) P5(-3.5,-5.5) P6(-2.5,-5.5) P7(-1.5,-5.5) P8(-0.5,-5.5) P9(0.5,-5.5) P10(1.5,-5.5) P11(2.5,-5.5) P12(3.5,-5.5) P13(4.5,-5.5) P14(5.5,-5.5) P15(6.5,-5.5) P16(7.5,-5.5) R1(-7.5,-6.5) R2(-6.5,-6.5) R3(-5.5,-6.5) R4(-4.5,-6.5) R5(-3.5,-6.5) R6(-2.5,-6.5) R7(-1.5,-6.5) R8(-0.5,-6.5) R9(0.5,-6.5) R10(1.5,-6.5) R11(2.5,-6.5) R12(3.5,-6.5) R13(4.5,-6.5) R14(5.5,-6.5) R15(6.5,-6.5) R16(7.5,-6.5) T1(-7.5,-7.5) T2(-6.5,-7.5) T3(-5.5,-7.5) T4(-4.5,-7.5) T5(-3.5,-7.5) T6(-2.5,-7.5) T7(-1.5,-7.5) T8(-0.5,-7.5) T9(0.5,-7.5) T10(1.5,-7.5) T11(2.5,-7.5) T12(3.5,-7.5) T13(4.5,-7.5) T14(5.5,-7.5) T15(6.5,-7.5) T16(7.5,-7.5)
  silkscreen extent -9.27,-8.5 8.5,8.5, body extent -8.5,-8.5 8.5,8.5, height 1.55
HDR1X2 [mm] "Connector; Header; 2 Position"
  rect 1.5x1.5 hole 0.9: 1(0,0)
  round 1.5 hole 0.9: 2(2.54,0)
  silkscreen extent -1.27,-1.27 3.81,1.27
HDR2X9 [mm] "Connector; Header; 9x2 Position"
  rect 1.5x1.5 hole 0.9: 1(0,0)
  round 1.5 hole 0.9: 2(0,2.54) 3(2.54,0) 4(2.54,2.54) 5(5.08,0) 6(5.08,2.54) 7(7.62,0) 8(7.62,2.54) 9(10.16,0) 10(10.16,2.54) 11(12.7,0) 12(12.7,2.54) 13(15.24,0) 14(15.24,2.54) 15(17.78,0) 16(17.78,2.54) 17(20.32,0) 18(20.32,2.54)
  silkscreen extent -1.27,-1.27 21.59,3.81
IDC-40J [mil]
  rect 68x68 hole 35: 1(-950,-50)
  round 68 hole 35: 2(-950,50) 3(-850,-50) 4(-850,50) 5(-750,-50) 6(-750,50) 7(-650,-50) 8(-650,50) 9(-550,-50) 10(-550,50) 11(-450,-50) 12(-450,50) 13(-350,-50) 14(-350,50) 15(-250,-50) 16(-250,50) 17(-150,-50) 18(-150,50) 19(-50,-50) 20(-50,50) 21(50,-50) 22(50,50) 23(150,-50) 24(150,50) 25(250,-50) 26(250,50) 27(350,-50) 28(350,50) 29(450,-50) 30(450,50) 31(550,-50) 32(550,50) 33(650,-50) 34(650,50) 35(750,-50) 36(750,50) 37(850,-50) 38(850,50) 39(950,-50) 40(950,50)
  silkscreen extent -1154,-167 1154,167
JTAG14-.5 [mm]
  rect 1.27x1.27 hole 0.711: 1(-6,-1)
  round 1.27 hole 0.711: 2(-6,1) 3(-4,-1) 4(-4,1) 5(-2,-1) 6(-2,1) 7(0,-1) 8(0,1) 9(2,-1) 10(2,1) 11(4,-1) 12(4,1) 13(6,-1) 14(6,1)
  silkscreen extent -10.57,-2.77 10.57,2.76
KEY735SO [mil]
  oval 140x55.12 smd: 1(0,0) 2(275,1)
  silkscreen extent 0,-67 276,71
KEY_DPDT [mil]
  round 75 hole 35: 1(0,0) 2(0,-100) 3(0,-200) 4(214.57,0) 5(214.57,-100) 6(214.57,-200)
  silkscreen extent -58,-268 277,68
LEDSO [mil]
  rect 60x50 smd: 1(90,0) 2(0,0)
  silkscreen extent -65,-40 140,40
LEDso [mil]
  rect 60x50 smd: 1(90,0) 2(0,0)
  silkscreen extent -65,-40 140,40
MINIUSBB [mm]
  rect 3x0.5 smd: 1(0,1.6) 2(0,0.8) 3(0,0) 4(0,-0.8) 5(0,-1.6)
  rect 2.5x2 smd: 6(-0.6,-4.45) 7(-6.1,-4.45) 8(-0.6,4.45) 9(-6.1,4.45)
  Keep-Out Layer circle w0.152: c-3.1,2.2 r0.5
  Keep-Out Layer circle w0.152: c-3.1,-2.2 r0.5
  silkscreen extent -9.05,-4.95 2,4.95
NIX_6 [mil]
  rect 60x60 hole 30: 1(0,0)
  round 60 hole 30: 2(100,0) 3(200,0) 4(300,0) 5(400,0) 6(500,0) 7(600,0) 8(600,400) 9(500,400) 10(400,400) 11(300,400) 12(200,400) 13(100,400) 14(0,400)
  silkscreen extent -606,-95 1206,495
QFN28 [mm]
  rect 2x2 smd: 0(2.75,-1.5)
  rect 1.2x0.27 smd: 1(0,0) 2(0,-0.5) 3(0,-1) 4(0,-1.5) 5(0,-2) 6(0,-2.5) 7(0,-3) 15(5.5,-3) 16(5.5,-2.5) 17(5.5,-2) 18(5.5,-1.5) 19(5.5,-1) 20(5.5,-0.5) 21(5.5,0)
  rect 0.27x1.2 smd: 8(1.25,-4.25) 9(1.75,-4.25) 10(2.25,-4.25) 11(2.75,-4.25) 12(3.25,-4.25) 13(3.75,-4.25) 14(4.25,-4.25) 22(4.25,1.25) 23(3.75,1.25) 24(3.25,1.25) 25(2.75,1.25) 26(2.25,1.25) 27(1.75,1.25) 28(1.25,1.25)
  silkscreen extent -0.1,-4 5.25,1.35
RN-8P [mm]
  rect 1x0.4 smd: 1(0,0) 2(0,-0.8) 3(0,-1.6) 4(0,-2.4) 5(1.858,-2.4) 6(1.858,-1.6) 7(1.858,-0.8) 8(1.858,0)
  silkscreen extent 0,-3.05 1.88,0.71
SIP2 [mil]
  rect 68x68 hole 35: 1(0,0)
  round 68 hole 35: 2(100,0)
  silkscreen extent -50,-50 150,50
SO8 [mil]
  rect 60x24 smd: 1(0,0) 2(0,-50) 3(0,-100) 4(0,-150) 5(220,-150) 6(220,-100) 7(220,-50) 8(220,0)
  silkscreen extent 40,-175 180,25
SOT23 [mil]
  rect 36x36 smd: 1(0,0) 2(75,0)
  rect 36x50 smd: 3(38,80)
  silkscreen extent -20,-5 95,85
SOT23-6 [mm]
  rect 0.5x1.27 smd: 1(0,0) 2(0.95,0) 3(1.905,0) 4(1.905,2.642) 5(0.95,2.642) 6(0,2.642)
  silkscreen extent -0.66,-0.99 2.51,3.61
SOT223 [mm]
  rect 1.2x2.2 smd: 1(0,0) 2(2.3,0) 3(4.6,0)
  rect 3.6x2.2 smd: 4(2.3,6.2)
  silkscreen extent -1.2,-1.7 5.8,7.9
TF [mm]
  rect 1.6x0.6 smd: 1(5.05,-2.25) 2(5.05,-1.15) 3(5.05,-0.05) 4(5.05,1.05) 5(5.05,2.15) 6(5.05,3.25) 7(5.05,4.35) 8(5.05,5.45) 9(5.05,6.55)
  rect 1.4x1.2 smd: 10(4.55,7.75)
  rect 2.2x1.2 smd: 11(-5.05,7.75) 12(-5.05,-7.75)
  rect 1.4x1.6 smd: 13(4.55,-6.85)
  Keep-Out Layer circle w0.127: c-5.45,4.951 r0.5
  Keep-Out Layer circle w0.127: c-5.45,-3.05 r0.5
  silkscreen extent -9.47,-7.15 4.01,7.29
TPS [mm]
  round 1.5 smd mask+0.5: 1(0,0)
TSOP-54 [mil]
  rect 17x75 smd: 1(0,0) 2(-31.5,0) 3(-62.99,0) 4(-94.49,0) 5(-125.98,0) 6(-157.48,0) 7(-188.98,0) 8(-220.47,0) 9(-251.97,0) 10(-283.46,0) 11(-314.99,0) 12(-346.46,0) 13(-377.95,0) 14(-409.45,0) 15(-440.94,0) 16(-472.44,0) 17(-503.94,0) 18(-535.43,0) 19(-566.93,0) 20(-598.43,0) 21(-629.92,0) 22(-661.42,0) 23(-692.91,0) 24(-724.41,0) 25(-755.91,0) 26(-787.4,0) 27(-818.9,0) 28(-818.9,-460) 29(-787.4,-460) 30(-755.91,-460) 31(-724.41,-460) 32(-692.91,-460) 33(-661.42,-460) 34(-630,-460) 35(-598.43,-460) 36(-566.93,-460) 37(-535.43,-460) 38(-503.94,-460) 39(-472.44,-460) 40(-440.94,-460) 41(-409.45,-460) 42(-377.95,-460) 43(-346.46,-460) 44(-314.99,-460) 45(-283.46,-460) 46(-251.97,-460) 47(-220.47,-460) 48(-188.98,-460) 49(-157.48,-460) 50(-125.98,-460) 51(-94.49,-460) 52(-62.99,-460) 53(-31.5,-460) 54(0,-460)
  silkscreen extent -852,-460 40,0
VGA [mil]
  rect 68x68 hole 35: 1(0,0)
  round 68 hole 35: 2(0,-90) 3(0,-180) 4(0,-270) 5(0,-360) 6(100,45) 7(100,-45) 8(100,-135) 9(100,-225) 10(100,-315) 11(200,0) 12(200,-90) 13(200,-180) 14(200,-270) 15(200,-360)
  round 220 hole 125: 16(100,-662) 17(100,322)
  silkscreen extent -100,-785 759,445

## Part data
C1 C2 C3 C5 C19 C46: library part "CAP NP_Dup2"
C4 C6 C7 C8 C9 C10 C11 C12 C13 C14 C15 C16 C17 C18 C20 C25 C27 C37 C44 C45 C48 C49: library part C_Dup4
C29 C30 C31 C32 C33 C34 C35: library part C_Dup2
C36: library part C_Dup3
C38 C39 C40 C41 C42 C43: library part C_Dup1
CB1: library part "Circuit Breaker", "Circuit Breaker"
EC2 EC4 EC5 EC6: library part EC
F1: library part "Fuse 2"
J1: library part MiniUSBB
J2 J3: library part MHDR2X20, "Header, 20-Pin, Dual row"
J4: library part "Connector 15", "Receptacle Assembly, 15-Pin, Sim Line Connector"
J5: "Header, 9-Pin, Dual row"
K1 K2 K3 K4 K5 K6: library part KEYB
L1: library part INDUCTOR
LED0 LED1 LED2 LED3 LED5 LED6: library part LED_Dup1
LED7 LED8: library part LED
LS1: library part SPEAKER
P1 P2 P4: library part "Header 2", "Header, 2-Pin"
P5: library part "Header 7X2", "Header, 7-Pin, Dual row"
Q1 Q2 Q3 Q4 Q5 Q6 Q7: library part PNP
R1 R8 R10 R12 R13 R14 R15 R28 R29 R30 R31 R41 R42 R43 R45 R47 R48 R49 R50 R51 R52: library part R
R2 R3 R75: library part RESISTOR
R4 R5 R6 R7 R11 R16 R32 R33 R34: library part R_Dup3
R9 R17 R20: library part R_Dup1
R18 R19 R21 R22 R35 R36 R37 R38 R39 R40 R44 R46: library part R_Dup2
R23 R24: library part R_Dup6
R25 R26 R27: library part R_Dup5
RN1 RN2 RN3 RN4 RN5 RN6 RN7 RN8 RN9 RN11 RN12 RN13 RN15 RN17 RN18 RN20 RN21 RN22 RN23 RN24 RN25 RN26 RN27 RN28 RN29 RN30 RN31 RN32 RN33: library part RN_Dup1
RN10 RN14 RN16 RN19 RN34: library part RN
SW1: library part "SW KEY-DPDT"
U4: library part CP2102_0
U5: library part 1117-3.3
U6: "Spartan-6 LX 1.2V FPGA, 186 User I/Os, 256-Ball Fine-Pitch Thin BGA (1.0mm Pitch), Speed Grade 2, Commercial Grade, Pb-Free"
U8: "16 Mb (x1) Automotive Serial NOR Flash Memory, 75 MHz, 2.7 to 3.6 V, 8-pin SO8 Narrow (MN), Tube"
U9: library part HY57651620/SO_0
U11: library part DS1302_8SO
U12: library part 24LC04B_0
X1: library part OSC
Y1: library part ZTA

## Free pads (board coordinates)
  round 250 hole 130: 0(160,160) 1(4958.11,160) 2(4958.11,3388) 3(160,3388)

## Via types
v1: diameter 20, hole 10, Top Layer to Bottom Layer, 328 vias
v2: diameter 30, hole 15, Top Layer to Bottom Layer, 95 vias
v3: diameter 40, hole 20, Top Layer to Bottom Layer, 2 vias

## Nets (pads, with @x,y where several pads share a name; then routed paths per layer and width w, separated by ;. In a path a pad name is that pad's centre, name@x,y a point inside that pad or via, vN(x,y) a via of type N, cw(c..) or ccw(c..) an arc to the next point about the centre after c; other vN are vias at no path point)
_A4: J3.3 RN22.4 | length 694.6
  Top Layer w5: J3.3@217,921.65 312.65,921.65 455.51,1064.51 RN22.4@468,1064.51 ; J3.3@228.67,909.99 cw(c256.83,881.82) 256.83,921.65 cw(c256.83,961.49) J3.3@228.67,933.32 ; J3.3@232.2,906.45 cw(c268.91,869.75) 268.91,921.65 cw(c268.91,973.56) J3.3@232.2,936.86 ; J3.3@235.74,902.92 cw(c280.98,857.68) 280.98,921.65 cw(c280.98,985.63) J3.3@235.74,940.39 ; J3.3@239.27,899.38 cw(c293.05,845.61) 293.05,921.65 cw(c293.05,997.7) J3.3@239.27,943.93 ; 445.86,1054.86 cw(c456.19,1044.53) RN22.4@456.19,1059.14 ; 447.49,1056.49 ccw(c439.48,1064.51) RN22.4@450.82,1064.51
_A5: J3.5 RN22.2 | length 679.3
  Top Layer w5: J3.5@217,1021.65 321.65,1021.65 427.5,1127.5 RN22.2@468,1127.5 ; J3.5@228.67,1009.99 cw(c256.83,981.82) 256.83,1021.65 cw(c256.83,1061.49) J3.5@228.67,1033.32 ; J3.5@232.2,1006.45 cw(c268.91,969.75) 268.91,1021.65 cw(c268.91,1073.56) J3.5@232.2,1036.86 ; J3.5@235.74,1002.92 cw(c280.98,957.68) 280.98,1021.65 cw(c280.98,1085.63) J3.5@235.74,1040.39 ; J3.5@239.27,999.38 cw(c293.05,945.61) 293.05,1021.65 cw(c293.05,1097.7) J3.5@239.27,1043.93 ; RN22.2@452.39,1123.7 ccw(c443.21,1114.53) 443.21,1127.5 ccw(c443.21,1140.48) RN22.2@452.39,1131.3
_A6: J3.7 RN21.4 | length 726.2
  Top Layer w5: J3.7@217,1121.65 338.65,1121.65 446.89,1229.89 ; J3.7@228.67,1109.99 cw(c256.83,1081.82) 256.83,1121.65 cw(c256.83,1161.49) J3.7@228.67,1133.32 ; J3.7@232.2,1106.45 cw(c268.91,1069.75) 268.91,1121.65 cw(c268.91,1173.56) J3.7@232.2,1136.86 ; J3.7@235.74,1102.92 cw(c280.98,1057.68) 280.98,1121.65 cw(c280.98,1185.63) J3.7@235.74,1140.39 ; J3.7@239.27,1099.38 cw(c293.05,1045.61) 293.05,1121.65 cw(c293.05,1197.7) J3.7@239.27,1143.93 ; 431.14,1214.13 cw(c456.19,1189.08) RN21.4@456.19,1224.51 ; 439.67,1222.67 cw(c456.19,1206.15) RN21.4@456.19,1229.51 ; 448.21,1231.21 cw(c456.19,1223.22) RN21.4@456.19,1234.51 ; RN21.4@451.53,1227.2 ccw(c446.89,1224.52) 446.89,1229.89 ; RN21.4@451.53,1232.57 cw(c446.89,1235.25) 446.89,1229.89 ; RN21.4@468,1229.89 446.89,1229.89
_A7: J3.8 RN21.3 | length 726.3
  Top Layer w5: J3.8@117,1121.65 164.35,1169 ; J3.8@118.55,1138.08 ccw(c121.28,1166.97) 141.8,1146.45 ccw(c162.32,1125.93) J3.8@133.43,1123.2 ; J3.8@119.02,1143.06 ccw(c122.57,1180.71) 149.31,1153.97 ccw(c176.06,1127.23) J3.8@138.4,1123.67 ; J3.8@119.49,1148.04 ccw(c123.87,1194.44) 156.83,1161.48 ccw(c189.79,1128.52) J3.8@143.38,1124.14 ; J3.8@119.96,1153.01 ccw(c125.17,1208.18) 164.34,1169 ; J3.8@148.36,1124.61 cw(c203.52,1129.82) 164.34,1169 ; RN21.3@452.39,1257.58 ccw(c443.21,1248.41) 443.21,1261.38 ccw(c443.21,1274.36) RN21.3@452.39,1265.18 ; RN21.3@468,1261.38 438.38,1261.38 346,1169 164.35,1169
_A8: J3.10 RN21.1 | length 732.1
  Top Layer w5: J3.10@117,1221.65 166.35,1271 ; J3.10@118.03,1238.12 ccw(c120.05,1270.3) 142.85,1247.5 ccw(c165.64,1224.7) J3.10@133.47,1222.69 ; J3.10@118.35,1243.11 ccw(c120.98,1285.04) 150.68,1255.33 ccw(c180.38,1225.63) J3.10@138.46,1223 ; J3.10@118.66,1248.1 ccw(c121.9,1299.78) 158.51,1263.16 ccw(c195.12,1226.55) J3.10@143.45,1223.31 ; J3.10@118.97,1253.09 ccw(c122.82,1314.52) 166.34,1271 ; J3.10@148.44,1223.63 cw(c209.86,1227.48) 166.34,1271 ; RN21.1@452.39,1320.58 ccw(c443.21,1311.4) 443.21,1324.38 ccw(c443.21,1337.35) RN21.1@452.39,1328.17 ; RN21.1@468,1324.38 417.38,1324.38 364,1271 166.35,1271
_A9: J3.12 RN20.3 | length 753.9
  Top Layer w5: J3.12@117,1321.65 168.35,1373 ; J3.12@117.55,1338.14 ccw(c118.73,1373.71) 143.89,1348.55 ccw(c169.06,1323.38) J3.12@133.49,1322.2 ; J3.12@117.71,1343.14 ccw(c119.26,1389.49) 152.04,1356.7 ccw(c184.83,1323.91) J3.12@138.49,1322.37 ; J3.12@117.88,1348.14 ccw(c119.78,1405.26) 160.19,1364.85 ccw(c200.61,1324.43) J3.12@143.49,1322.53 ; J3.12@118.05,1353.14 ccw(c120.3,1421.04) 168.34,1373 ; J3.12@148.48,1322.7 cw(c216.38,1324.96) 168.34,1373 ; RN20.3@452.39,1422.96 ccw(c443.21,1413.78) 443.21,1426.76 ccw(c443.21,1439.73) RN20.3@452.39,1430.56 ; RN20.3@468,1426.76 439.76,1426.76 386,1373 168.35,1373
_A10: J3.13 RN20.2 | length 650.6
  Top Layer w5: J3.13@217,1421.65 396.65,1421.65 433.25,1458.25 RN20.2@468,1458.25 ; J3.13@228.67,1409.99 cw(c256.83,1381.82) 256.83,1421.65 cw(c256.83,1461.49) J3.13@228.67,1433.32 ; J3.13@232.2,1406.45 cw(c268.91,1369.75) 268.91,1421.65 cw(c268.91,1473.56) J3.13@232.2,1436.86 ; J3.13@235.74,1402.92 cw(c280.98,1357.68) 280.98,1421.65 cw(c280.98,1485.63) J3.13@235.74,1440.39 ; J3.13@239.27,1399.38 cw(c293.05,1345.61) 293.05,1421.65 cw(c293.05,1497.7) J3.13@239.27,1443.93 ; RN20.2@452.39,1454.45 ccw(c443.21,1445.28) 443.21,1458.25 ccw(c443.21,1471.23) RN20.2@452.39,1462.05
_A11: J3.15 RN18.4 | length 651.6
  Top Layer w5: J3.15@217,1521.65 402.65,1521.65 441.64,1560.64 RN18.4@468,1560.64 ; J3.15@228.67,1509.99 cw(c256.83,1481.82) 256.83,1521.65 cw(c256.83,1561.49) J3.15@228.67,1533.32 ; J3.15@232.2,1506.45 cw(c268.91,1469.75) 268.91,1521.65 cw(c268.91,1573.56) J3.15@232.2,1536.86 ; J3.15@235.74,1502.92 cw(c280.98,1457.68) 280.98,1521.65 cw(c280.98,1585.63) J3.15@235.74,1540.39 ; J3.15@239.27,1499.38 cw(c293.05,1445.61) 293.05,1521.65 cw(c293.05,1597.7) J3.15@239.27,1543.93 ; RN18.4@452.39,1556.84 ccw(c443.21,1547.66) 443.21,1560.64 ccw(c443.21,1573.61) RN18.4@452.39,1564.44
_A12: J3.16 RN18.3 | length 739.6
  Top Layer w5: J3.16@117,1521.65 168.35,1573 ; J3.16@117.55,1538.14 ccw(c118.73,1573.71) 143.89,1548.55 ccw(c169.06,1523.38) J3.16@133.49,1522.2 ; J3.16@117.71,1543.14 ccw(c119.26,1589.49) 152.04,1556.7 ccw(c184.83,1523.91) J3.16@138.49,1522.37 ; J3.16@117.88,1548.14 ccw(c119.78,1605.26) 160.19,1564.85 ccw(c200.61,1524.43) J3.16@143.49,1522.53 ; J3.16@118.05,1553.14 ccw(c120.3,1621.04) 168.34,1573 ; J3.16@148.48,1522.7 cw(c216.38,1524.96) 168.34,1573 ; RN18.3@452.39,1588.33 ccw(c443.21,1579.16) 443.21,1592.13 ccw(c443.21,1605.11) RN18.3@452.39,1595.93 ; RN18.3@468,1592.13 439.13,1592.13 420,1573 168.35,1573
_A13: J3.18 RN18.1 | length 705.2
  Top Layer w5: J3.18@117,1621.65 165.35,1670 ; J3.18@118.29,1638.1 ccw(c120.68,1668.62) 142.32,1646.98 ccw(c163.97,1625.33) J3.18@133.45,1622.94 ; J3.18@118.68,1643.09 ccw(c121.79,1682.86) 150,1654.65 ccw(c178.21,1626.44) J3.18@138.43,1623.33 ; J3.18@119.07,1648.07 ccw(c122.9,1697.09) 157.67,1662.32 ccw(c192.44,1627.56) J3.18@143.42,1623.72 ; J3.18@119.46,1653.06 ccw(c124.02,1711.33) 165.34,1670 ; J3.18@148.4,1624.11 cw(c206.67,1628.67) 165.34,1670 ; RN18.1@452.39,1651.33 ccw(c443.21,1642.15) 443.21,1655.12 ccw(c443.21,1668.1) RN18.1@452.39,1658.92 ; RN18.1@468,1655.12 439.88,1655.12 425,1670 165.35,1670
_A14: J3.19 RN17.4 | length 651.1
  Top Layer w5: J3.19@217,1721.65 221.36,1726.01 RN17.4@468,1726.01 ; J3.19@225.13,1713.52 cw(c255.29,1683.37) 255.29,1726.01 ; J3.19@228.67,1709.99 cw(c267.36,1671.3) 267.36,1726.01 ; J3.19@232.2,1706.45 cw(c279.43,1659.23) 279.43,1726.01 ; J3.19@232.2,1736.86 ccw(c258.38,1763.04) 258.38,1726.01 ; J3.19@235.74,1702.92 cw(c291.5,1647.16) 291.5,1726.01 ; J3.19@235.74,1740.39 ccw(c270.45,1775.11) 270.45,1726.01 ; J3.19@239.27,1699.38 cw(c303.57,1635.08) 303.57,1726.01 ; J3.19@239.27,1743.93 ccw(c282.53,1787.18) 282.53,1726.01 ; RN17.4@452.39,1722.21 ccw(c443.21,1713.04) 443.21,1726.01 ccw(c443.21,1738.99) RN17.4@452.39,1729.81
_B5: J3.4 RN22.3 | length 761.7
  Top Layer w5: J3.4@117,921.65 166.35,971 ; J3.4@118.03,938.12 ccw(c120.05,970.3) 142.85,947.5 ccw(c165.64,924.7) J3.4@133.47,922.69 ; J3.4@118.35,943.11 ccw(c120.98,985.04) 150.68,955.33 ccw(c180.38,925.63) J3.4@138.46,923 ; J3.4@118.66,948.1 ccw(c121.9,999.78) 158.51,963.16 ccw(c195.12,926.55) J3.4@143.45,923.31 ; J3.4@118.97,953.09 ccw(c122.82,1014.52) 166.34,971 ; J3.4@148.44,923.63 cw(c209.86,927.48) 166.34,971 ; RN22.3@452.39,1092.21 ccw(c443.21,1083.03) 443.21,1096.01 ccw(c443.21,1108.98) RN22.3@452.39,1099.81 ; RN22.3@468,1096.01 443.01,1096.01 318,971 166.35,971
_B6: J3.6 RN22.1 | length 756.9
  Top Layer w5: J3.6@117,1021.65 167.35,1072 ; J3.6@117.79,1038.13 ccw(c119.4,1071.99) 143.37,1048.02 ccw(c167.34,1024.06) J3.6@133.48,1022.44 ; J3.6@118.02,1043.13 ccw(c120.13,1087.25) 151.36,1056.02 ccw(c182.59,1024.78) J3.6@138.48,1022.68 ; J3.6@118.26,1048.12 ccw(c120.86,1102.5) 159.35,1064.01 ccw(c197.85,1025.51) J3.6@143.47,1022.92 ; J3.6@118.5,1053.12 ccw(c121.59,1117.76) 167.34,1072 ; J3.6@148.46,1023.15 cw(c213.1,1026.24) 167.34,1072 ; RN22.1@452.39,1155.2 ccw(c443.21,1146.03) 443.21,1159 ccw(c443.21,1171.97) RN22.1@452.39,1162.8 ; RN22.1@468,1159 414,1159 327,1072 167.35,1072
_B8: J3.9 RN21.2 | length 664.9
  Top Layer w5: J3.9@217,1221.65 356.65,1221.65 427.88,1292.88 RN21.2@468,1292.88 ; J3.9@228.67,1209.99 cw(c256.83,1181.82) 256.83,1221.65 cw(c256.83,1261.49) J3.9@228.67,1233.32 ; J3.9@232.2,1206.45 cw(c268.91,1169.75) 268.91,1221.65 cw(c268.91,1273.56) J3.9@232.2,1236.86 ; J3.9@235.74,1202.92 cw(c280.98,1157.68) 280.98,1221.65 cw(c280.98,1285.63) J3.9@235.74,1240.39 ; J3.9@239.27,1199.38 cw(c293.05,1145.61) 293.05,1221.65 cw(c293.05,1297.7) J3.9@239.27,1243.93 ; RN21.2@452.39,1289.08 ccw(c443.21,1279.9) 443.21,1292.88 ccw(c443.21,1305.85) RN21.2@452.39,1296.68
_B10: J3.14 RN20.1 | length 707.2
  Top Layer w5: J3.14@117,1421.65 165.35,1470 ; J3.14@118.29,1438.1 ccw(c120.68,1468.62) 142.32,1446.98 ccw(c163.97,1425.33) J3.14@133.45,1422.94 ; J3.14@118.68,1443.09 ccw(c121.79,1482.86) 150,1454.65 ccw(c178.21,1426.44) J3.14@138.43,1423.33 ; J3.14@119.07,1448.07 ccw(c122.9,1497.09) 157.67,1462.32 ccw(c192.44,1427.56) J3.14@143.42,1423.72 ; J3.14@119.46,1453.06 ccw(c124.02,1511.33) 165.34,1470 ; J3.14@148.4,1424.11 cw(c206.67,1428.67) 165.34,1470 ; RN20.1@452.39,1485.95 ccw(c443.21,1476.78) 443.21,1489.75 ccw(c443.21,1502.72) RN20.1@452.39,1493.55 ; RN20.1@468,1489.75 421.75,1489.75 402,1470 165.35,1470
_B12: J3.17 RN18.2 | length 636.3
  Top Layer w5: J3.17@217,1621.65 218.98,1623.63 RN18.2@468,1623.63 ; J3.17@228.67,1609.99 cw(c261.6,1577.05) 261.6,1623.63 ; J3.17@228.67,1633.32 ccw(c252.07,1656.72) 252.07,1623.63 ; J3.17@232.2,1606.45 cw(c273.67,1564.98) 273.67,1623.63 ; J3.17@232.2,1636.86 ccw(c264.14,1668.79) 264.14,1623.63 ; J3.17@235.74,1602.92 cw(c285.75,1552.91) 285.75,1623.63 ; J3.17@235.74,1640.39 ccw(c276.21,1680.86) 276.21,1623.63 ; J3.17@239.27,1599.38 cw(c297.82,1540.84) 297.82,1623.63 ; J3.17@239.27,1643.93 ccw(c288.28,1692.93) 288.28,1623.63 ; RN18.2@452.39,1619.83 ccw(c443.21,1610.65) 443.21,1623.63 ccw(c443.21,1636.6) RN18.2@452.39,1627.43
_B14: J3.20 RN17.3 | length 715.5
  Top Layer w5: J3.20@117,1721.65 166.35,1771 ; J3.20@118.03,1738.12 ccw(c120.05,1770.3) 142.85,1747.5 ccw(c165.64,1724.7) J3.20@133.47,1722.69 ; J3.20@118.35,1743.11 ccw(c120.98,1785.04) 150.68,1755.33 ccw(c180.38,1725.63) J3.20@138.46,1723 ; J3.20@118.66,1748.1 ccw(c121.9,1799.78) 158.51,1763.16 ccw(c195.12,1726.55) J3.20@143.45,1723.31 ; J3.20@118.97,1753.09 ccw(c122.82,1814.52) 166.34,1771 ; J3.20@148.44,1723.63 cw(c209.86,1727.48) 166.34,1771 ; RN17.3@452.39,1753.71 ccw(c443.21,1744.53) 443.21,1757.51 ccw(c443.21,1770.48) RN17.3@452.39,1761.31 ; RN17.3@468,1757.51 383.49,1757.51 370,1771 166.35,1771
_B15: J3.21 RN17.2 | length 649
  Top Layer w5: J3.21@217,1821.65 359.35,1821.65 392,1789 RN17.2@468,1789 ; J3.21@228.67,1809.99 cw(c256.83,1781.82) 256.83,1821.65 cw(c256.83,1861.49) J3.21@228.67,1833.32 ; J3.21@232.2,1806.45 cw(c268.91,1769.75) 268.91,1821.65 cw(c268.91,1873.56) J3.21@232.2,1836.86 ; J3.21@235.74,1802.92 cw(c280.98,1757.68) 280.98,1821.65 cw(c280.98,1885.63) J3.21@235.74,1840.39 ; J3.21@239.27,1799.38 cw(c293.05,1745.61) 293.05,1821.65 cw(c293.05,1897.7) J3.21@239.27,1843.93 ; RN17.2@452.39,1785.2 ccw(c443.21,1776.03) 443.21,1789 ccw(c443.21,1801.98) RN17.2@452.39,1792.8
_B16: J3.22 RN17.1 | length 742.2
  Top Layer w5: J3.22@117,1821.65 167.35,1872 ; J3.22@117.79,1838.13 ccw(c119.4,1871.99) 143.37,1848.02 ccw(c167.34,1824.06) J3.22@133.48,1822.44 ; J3.22@118.02,1843.13 ccw(c120.13,1887.25) 151.36,1856.02 ccw(c182.59,1824.78) J3.22@138.48,1822.68 ; J3.22@118.26,1848.12 ccw(c120.86,1902.5) 159.35,1864.01 ccw(c197.85,1825.51) J3.22@143.47,1822.92 ; J3.22@118.5,1853.12 ccw(c121.59,1917.76) 167.34,1872 ; J3.22@148.46,1823.15 cw(c213.1,1826.24) 167.34,1872 ; RN17.1@452.39,1816.7 ccw(c443.21,1807.53) 443.21,1820.5 ccw(c443.21,1833.47) RN17.1@452.39,1824.3 ; RN17.1@468,1820.5 392.5,1820.5 341,1872 167.35,1872
_C8: J3.11 RN20.4 | length 665.9
  Top Layer w5: J3.11@217,1321.65 366.65,1321.65 440.26,1395.26 RN20.4@468,1395.26 ; J3.11@228.67,1309.99 cw(c256.83,1281.82) 256.83,1321.65 cw(c256.83,1361.49) J3.11@228.67,1333.32 ; J3.11@232.2,1306.45 cw(c268.91,1269.75) 268.91,1321.65 cw(c268.91,1373.56) J3.11@232.2,1336.86 ; J3.11@235.74,1302.92 cw(c280.98,1257.68) 280.98,1321.65 cw(c280.98,1385.63) J3.11@235.74,1340.39 ; J3.11@239.27,1299.38 cw(c293.05,1245.61) 293.05,1321.65 cw(c293.05,1397.7) J3.11@239.27,1343.93 ; RN20.4@452.39,1391.46 ccw(c443.21,1382.29) 443.21,1395.26 ccw(c443.21,1408.24) RN20.4@452.39,1399.06
_C9: J3.27 RN13.4 | length 662.3
  Top Layer w5: J3.27@217,2121.65 332.35,2121.65 397.24,2056.76 RN13.4@468,2056.76 ; J3.27@228.67,2109.99 cw(c256.83,2081.82) 256.83,2121.65 cw(c256.83,2161.49) J3.27@228.67,2133.32 ; J3.27@232.2,2106.45 cw(c268.91,2069.75) 268.91,2121.65 cw(c268.91,2173.56) J3.27@232.2,2136.86 ; J3.27@235.74,2102.92 cw(c280.98,2057.68) 280.98,2121.65 cw(c280.98,2185.63) J3.27@235.74,2140.39 ; J3.27@239.27,2099.38 cw(c293.05,2045.61) 293.05,2121.65 cw(c293.05,2197.7) J3.27@239.27,2143.93 ; RN13.4@452.39,2052.96 ccw(c443.21,2043.79) 443.21,2056.76 ccw(c443.21,2069.74) RN13.4@452.39,2060.56
_C10: J3.29 RN13.2 | length 677.6
  Top Layer w5: J3.29@217,2221.65 301.35,2221.65 403.25,2119.75 RN13.2@468,2119.75 ; J3.29@228.67,2209.99 cw(c256.83,2181.82) 256.83,2221.65 cw(c256.83,2261.49) J3.29@228.67,2233.32 ; J3.29@232.2,2206.45 cw(c268.91,2169.75) 268.91,2221.65 cw(c268.91,2273.56) J3.29@232.2,2236.86 ; J3.29@235.74,2202.92 cw(c280.98,2157.68) 280.98,2221.65 cw(c280.98,2285.63) J3.29@235.74,2240.39 ; J3.29@239.27,2199.38 cw(c293.05,2145.61) 293.05,2221.65 cw(c293.05,2297.7) J3.29@239.27,2243.93 ; RN13.2@452.39,2115.95 ccw(c443.21,2106.78) 443.21,2119.75 ccw(c443.21,2132.73) RN13.2@452.39,2123.55
_C15: J3.23 RN15.4 | length 648
  Top Layer w5: J3.23@217,1921.65 354.35,1921.65 384.61,1891.39 RN15.4@468,1891.39 ; J3.23@228.67,1909.99 cw(c256.83,1881.82) 256.83,1921.65 cw(c256.83,1961.49) J3.23@228.67,1933.32 ; J3.23@232.2,1906.45 cw(c268.91,1869.75) 268.91,1921.65 cw(c268.91,1973.56) J3.23@232.2,1936.86 ; J3.23@235.74,1902.92 cw(c280.98,1857.68) 280.98,1921.65 cw(c280.98,1985.63) J3.23@235.74,1940.39 ; J3.23@239.27,1899.38 cw(c293.05,1845.61) 293.05,1921.65 cw(c293.05,1997.7) J3.23@239.27,1943.93 ; RN15.4@452.39,1887.59 ccw(c443.21,1878.41) 443.21,1891.39 ccw(c443.21,1904.36) RN15.4@452.39,1895.19
_C16: J3.24 RN15.3 | length 741.2
  Top Layer w5: J3.24@117,1921.65 167.35,1972 ; J3.24@117.79,1938.13 ccw(c119.4,1971.99) 143.37,1948.02 ccw(c167.34,1924.06) J3.24@133.48,1922.44 ; J3.24@118.02,1943.13 ccw(c120.13,1987.25) 151.36,1956.02 ccw(c182.59,1924.78) J3.24@138.48,1922.68 ; J3.24@118.26,1948.12 ccw(c120.86,2002.5) 159.35,1964.01 ccw(c197.85,1925.51) J3.24@143.47,1922.92 ; J3.24@118.5,1953.12 ccw(c121.59,2017.76) 167.34,1972 ; J3.24@148.46,1923.15 cw(c213.1,1926.24) 167.34,1972 ; RN15.3@452.39,1919.08 ccw(c443.21,1909.91) 443.21,1922.88 ccw(c443.21,1935.86) RN15.3@452.39,1926.68 ; RN15.3@468,1922.88 394.12,1922.88 345,1972 167.35,1972
_D11: J3.30 RN13.1 | length 770.8
  Top Layer w5: J3.30@117,2221.65 167.35,2272 ; J3.30@117.79,2238.13 ccw(c119.4,2271.99) 143.37,2248.02 ccw(c167.34,2224.06) J3.30@133.48,2222.44 ; J3.30@118.02,2243.13 ccw(c120.13,2287.25) 151.36,2256.02 ccw(c182.59,2224.78) J3.30@138.48,2222.68 ; J3.30@118.26,2248.12 ccw(c120.86,2302.5) 159.35,2264.01 ccw(c197.85,2225.51) J3.30@143.47,2222.92 ; J3.30@118.5,2253.12 ccw(c121.59,2317.76) 167.34,2272 ; J3.30@148.46,2223.15 cw(c213.1,2226.24) 167.34,2272 ; RN13.1@452.39,2147.45 ccw(c443.21,2138.28) 443.21,2151.25 ccw(c443.21,2164.22) RN13.1@452.39,2155.05 ; RN13.1@468,2151.25 403.75,2151.25 283,2272 167.35,2272
_D16: J3.25 RN15.2 | length 663.3
  Top Layer w5: J3.25@217,2021.65 340.35,2021.65 407.62,1954.38 RN15.2@468,1954.38 ; J3.25@228.67,2009.99 cw(c256.83,1981.82) 256.83,2021.65 cw(c256.83,2061.49) J3.25@228.67,2033.32 ; J3.25@232.2,2006.45 cw(c268.91,1969.75) 268.91,2021.65 cw(c268.91,2073.56) J3.25@232.2,2036.86 ; J3.25@235.74,2002.92 cw(c280.98,1957.68) 280.98,2021.65 cw(c280.98,2085.63) J3.25@235.74,2040.39 ; J3.25@239.27,1999.38 cw(c293.05,1945.61) 293.05,2021.65 cw(c293.05,2097.7) J3.25@239.27,2043.93 ; RN15.2@452.39,1950.58 ccw(c443.21,1941.4) 443.21,1954.38 ccw(c443.21,1967.35) RN15.2@452.39,1958.18
_E11: J3.28 RN13.3 | length 732.9
  Top Layer w5: J3.28@117,2121.65 165.35,2170 ; J3.28@118.29,2138.1 ccw(c120.68,2168.62) 142.32,2146.98 ccw(c163.97,2125.33) J3.28@133.45,2122.94 ; J3.28@118.68,2143.09 ccw(c121.79,2182.86) 150,2154.65 ccw(c178.21,2126.44) J3.28@138.43,2123.33 ; J3.28@119.07,2148.07 ccw(c122.9,2197.09) 157.67,2162.32 ccw(c192.44,2127.56) J3.28@143.42,2123.72 ; J3.28@119.46,2153.06 ccw(c124.02,2211.33) 165.34,2170 ; J3.28@148.4,2124.11 cw(c206.67,2128.67) 165.34,2170 ; RN13.3@452.39,2084.46 ccw(c443.21,2075.28) 443.21,2088.26 ccw(c443.21,2101.23) RN13.3@452.39,2092.06 ; RN13.3@468,2088.26 401.74,2088.26 320,2170 165.35,2170
_E15: J3.26 RN15.1 | length 722.4
  Top Layer w5: J3.26@117,2021.65 164.35,2069 ; J3.26@118.55,2038.08 ccw(c121.28,2066.97) 141.8,2046.45 ccw(c162.32,2025.93) J3.26@133.43,2023.2 ; J3.26@119.02,2043.06 ccw(c122.57,2080.71) 149.31,2053.97 ccw(c176.06,2027.23) J3.26@138.4,2023.67 ; J3.26@119.49,2048.04 ccw(c123.87,2094.44) 156.83,2061.48 ccw(c189.79,2028.52) J3.26@143.38,2024.14 ; J3.26@119.96,2053.01 ccw(c125.17,2108.18) 164.34,2069 ; J3.26@148.36,2024.61 cw(c203.52,2029.82) 164.34,2069 ; RN15.1@452.39,1982.08 ccw(c443.21,1972.9) 443.21,1985.88 ccw(c443.21,1998.85) RN15.1@452.39,1989.67 ; RN15.1@468,1985.88 413.12,1985.88 330,2069 164.35,2069
_E16: J3.31 RN12.4 | length 612.5
  Top Layer w5: J3.31@217,2321.65 284.35,2321.65 ; J3.31@229.66,2311.08 cw(c252.28,2292.2) 252.28,2321.65 cw(c252.28,2351.11) J3.31@229.66,2332.23 ; J3.31@233.5,2307.87 cw(c262.96,2283.27) 262.96,2321.65 cw(c262.96,2360.04) J3.31@233.5,2335.43 ; J3.31@237.34,2304.67 cw(c273.65,2274.34) 273.65,2321.65 cw(c273.65,2368.96) J3.31@237.34,2338.64 ; J3.31@241.18,2301.46 cw(c284.34,2265.42) 284.34,2321.65 ; J3.31@241.18,2341.84 ccw(c284.34,2377.89) 284.34,2321.65 ; RN12.4@452.39,2218.34 ccw(c443.21,2209.16) 443.21,2222.14 ccw(c443.21,2235.11) RN12.4@452.39,2225.94 ; RN12.4@468,2222.14 383.86,2222.14 284.35,2321.65
_F15: J3.32 RN12.3 | length 747.2
  Top Layer w5: J3.32@117,2321.65 165.35,2370 ; J3.32@118.29,2338.1 ccw(c120.68,2368.62) 142.32,2346.98 ccw(c163.97,2325.33) J3.32@133.45,2322.94 ; J3.32@118.68,2343.09 ccw(c121.79,2382.86) 150,2354.65 ccw(c178.21,2326.44) J3.32@138.43,2323.33 ; J3.32@119.07,2348.07 ccw(c122.9,2397.09) 157.67,2362.32 ccw(c192.44,2327.56) J3.32@143.42,2323.72 ; J3.32@119.46,2353.06 ccw(c124.02,2411.33) 165.34,2370 ; J3.32@148.4,2324.11 cw(c206.67,2328.67) 165.34,2370 ; RN12.3@452.39,2249.83 ccw(c443.21,2240.66) 443.21,2253.63 ccw(c443.21,2266.61) RN12.3@452.39,2257.43 ; RN12.3@468,2253.63 393.37,2253.63 277,2370 165.35,2370
_F16: J3.33 RN12.2 | length 479.6
  Top Layer w5: J3.33@217,2421.65 269.35,2421.65 ; J3.33@236,2411.59 cw(c252.73,2402.72) 252.73,2421.65 cw(c252.73,2440.59) J3.33@236,2431.72 ; J3.33@240.41,2409.24 cw(c261.04,2398.32) 261.04,2421.65 cw(c261.04,2444.99) J3.33@240.41,2434.06 ; J3.33@244.83,2406.9 cw(c269.34,2393.91) 269.34,2421.65 ; J3.33@244.83,2436.4 ccw(c269.34,2449.39) 269.34,2421.65 ; RN12.2@452.39,2281.33 ccw(c443.21,2272.15) 443.21,2285.13 ccw(c443.21,2298.1) RN12.2@452.39,2288.93 ; RN12.2@468,2285.13 405.87,2285.13 269.35,2421.65
_G16: J3.34 RN12.1 | length 762.5
  Top Layer w5: J3.34@117,2421.65 165.35,2470 ; J3.34@118.29,2438.1 ccw(c120.68,2468.62) 142.32,2446.98 ccw(c163.97,2425.33) J3.34@133.45,2422.94 ; J3.34@118.68,2443.09 ccw(c121.79,2482.86) 150,2454.65 ccw(c178.21,2426.44) J3.34@138.43,2423.33 ; J3.34@119.07,2448.07 ccw(c122.9,2497.09) 157.67,2462.32 ccw(c192.44,2427.56) J3.34@143.42,2423.72 ; J3.34@119.46,2453.06 ccw(c124.02,2511.33) 165.34,2470 ; J3.34@148.4,2424.11 cw(c206.67,2428.67) 165.34,2470 ; RN12.1@452.39,2312.83 ccw(c443.21,2303.65) 443.21,2316.62 ccw(c443.21,2329.6) RN12.1@452.39,2320.42 ; RN12.1@468,2316.62 410.38,2316.62 257,2470 165.35,2470
_H15: J3.35 RN11.4 | length 691
  Top Layer w5: J3.35@217,2521.65 307.35,2521.65 441.49,2387.51 RN11.4@468,2387.51 ; J3.35@228.67,2509.99 cw(c256.83,2481.82) 256.83,2521.65 cw(c256.83,2561.49) J3.35@228.67,2533.32 ; J3.35@232.2,2506.45 cw(c268.91,2469.75) 268.91,2521.65 cw(c268.91,2573.56) J3.35@232.2,2536.86 ; J3.35@235.74,2502.92 cw(c280.98,2457.68) 280.98,2521.65 cw(c280.98,2585.63) J3.35@235.74,2540.39 ; J3.35@239.27,2499.38 cw(c293.05,2445.61) 293.05,2521.65 cw(c293.05,2597.7) J3.35@239.27,2543.93 ; RN11.4@452.39,2383.71 ccw(c443.21,2374.54) 443.21,2387.51 ccw(c443.21,2400.49) RN11.4@452.39,2391.31
_H16: J3.36 RN11.3 | length 759.7
  Top Layer w5: J3.36@117,2521.65 165.35,2570 ; J3.36@118.29,2538.1 ccw(c120.68,2568.62) 142.32,2546.98 ccw(c163.97,2525.33) J3.36@133.45,2522.94 ; J3.36@118.68,2543.09 ccw(c121.79,2582.86) 150,2554.65 ccw(c178.21,2526.44) J3.36@138.43,2523.33 ; J3.36@119.07,2548.07 ccw(c122.9,2597.09) 157.67,2562.32 ccw(c192.44,2527.56) J3.36@143.42,2523.72 ; J3.36@119.46,2553.06 ccw(c124.02,2611.33) 165.34,2570 ; J3.36@148.4,2524.11 cw(c206.67,2528.67) 165.34,2570 ; RN11.3@452.22,2415.38 ccw(c443.99,2407.86) 443.99,2419.01 ; RN11.3@452.22,2422.63 cw(c443.99,2430.16) 443.99,2419.01 ; RN11.3@468,2419.01 443.99,2419.01 ; 165.35,2570 293,2570 443.99,2419.01
_J16: J2.4 RN1.8 | length 764.6
  Top Layer w5: RN1.8@4646.15,2482 4669,2482 ; RN1.8@4662.19,2478.69 cw(c4669,2473.35) 4669,2482 ; RN1.8@4662.19,2485.31 ccw(c4669,2490.65) 4669,2482 ; J2.4@4969.64,2624.61 ccw(c4914.48,2629.82) 4953.66,2669 ; J2.4@4974.62,2624.14 ccw(c4928.21,2628.52) 4961.17,2661.48 ccw(c4994.13,2694.44) J2.4@4998.51,2648.04 ; J2.4@4979.6,2623.67 ccw(c4941.94,2627.23) 4968.69,2653.97 ccw(c4995.43,2680.71) J2.4@4998.98,2643.06 ; J2.4@4984.57,2623.2 ccw(c4955.68,2625.93) 4976.2,2646.45 ccw(c4996.72,2666.97) J2.4@4999.45,2638.08 ; J2.4@4998.04,2653.01 cw(c4992.83,2708.18) 4953.66,2669 ; J2.4@5001,2621.65 4953.65,2669 ; 4669,2482 4856,2669 4953.65,2669
_K15: J2.6 RN1.6 | length 788.1
  Top Layer w5: RN1.6@4646.15,2419.01 4688.01,2419.01 4841,2572 4950.65,2572 ; RN1.6@4661.76,2415.21 cw(c4670.94,2406.03) 4670.94,2419.01 cw(c4670.94,2431.98) RN1.6@4661.76,2422.81 ; J2.6@4969.54,2523.15 ccw(c4904.9,2526.24) 4950.66,2572 ; J2.6@4974.53,2522.92 ccw(c4920.15,2525.51) 4958.65,2564.01 ccw(c4997.14,2602.5) J2.6@4999.74,2548.12 ; J2.6@4979.52,2522.68 ccw(c4935.41,2524.78) 4966.64,2556.02 ccw(c4997.87,2587.25) J2.6@4999.98,2543.13 ; J2.6@4984.52,2522.44 ccw(c4950.66,2524.06) 4974.63,2548.02 ccw(c4998.6,2571.99) J2.6@5000.21,2538.13 ; J2.6@4999.5,2553.12 cw(c4996.41,2617.76) 4950.66,2572 ; J2.6@5001,2521.65 4950.65,2572
_K16: J2.3 RN1.7 | length 484.3
  Top Layer w5: RN1.7@4646.15,2450.5 4679.5,2450.5 4850.65,2621.65 ; RN1.7@4661.76,2446.7 cw(c4670.94,2437.53) 4670.94,2450.5 cw(c4670.94,2463.48) RN1.7@4661.76,2454.3 ; J2.3@4872.67,2607.88 ccw(c4850.65,2597.17) 4850.65,2621.65 ; J2.3@4872.67,2635.43 cw(c4850.65,2646.14) 4850.65,2621.65 ; J2.3@4877.17,2610.06 ccw(c4858.65,2601.06) 4858.65,2621.65 ccw(c4858.65,2642.25) J2.3@4877.17,2633.24 ; J2.3@4881.66,2612.25 ccw(c4866.64,2604.94) 4866.64,2621.65 ccw(c4866.64,2638.36) J2.3@4881.66,2631.06 ; J2.3@4901,2621.65 4850.65,2621.65
_L8: J2.21 RN5.5 | length 648.8
  Top Layer w5: RN5.5@4646.15,1726.01 J2.21@4896.64,1726.01 ; RN5.5@4661.76,1722.21 cw(c4670.94,1713.04) 4670.94,1726.01 cw(c4670.94,1738.99) RN5.5@4661.76,1729.81 ; 4814.43,1726.01 cw(c4814.43,1635.08) J2.21@4878.73,1699.38 ; 4826.5,1726.01 cw(c4826.5,1647.15) J2.21@4882.26,1702.92 ; 4835.47,1726.01 ccw(c4835.47,1787.18) J2.21@4878.73,1743.93 ; 4838.57,1726.01 cw(c4838.57,1659.23) J2.21@4885.8,1706.45 ; 4847.55,1726.01 ccw(c4847.55,1775.11) J2.21@4882.26,1740.39 ; 4850.64,1726.01 cw(c4850.64,1671.3) J2.21@4889.33,1709.99 ; 4859.62,1726.01 ccw(c4859.62,1763.04) J2.21@4885.8,1736.86 ; 4862.71,1726.01 cw(c4862.71,1683.37) J2.21@4892.87,1713.52